# Altium PCB BUCK3524PCB.PcbDoc
Units mm, origin at the board's own origin, x right, y up, seen from the top; angles counter-clockwise.
Board outline 50 x 50 mm, 6 copper layers (Top Layer, Layer 2(GND), Layer 3(PWR), Layer 4(SIG), Layer 5(GND), Bottom Layer), stack 1.538 mm thick; 68 components, 30 nets, 179 pads, 179 vias.
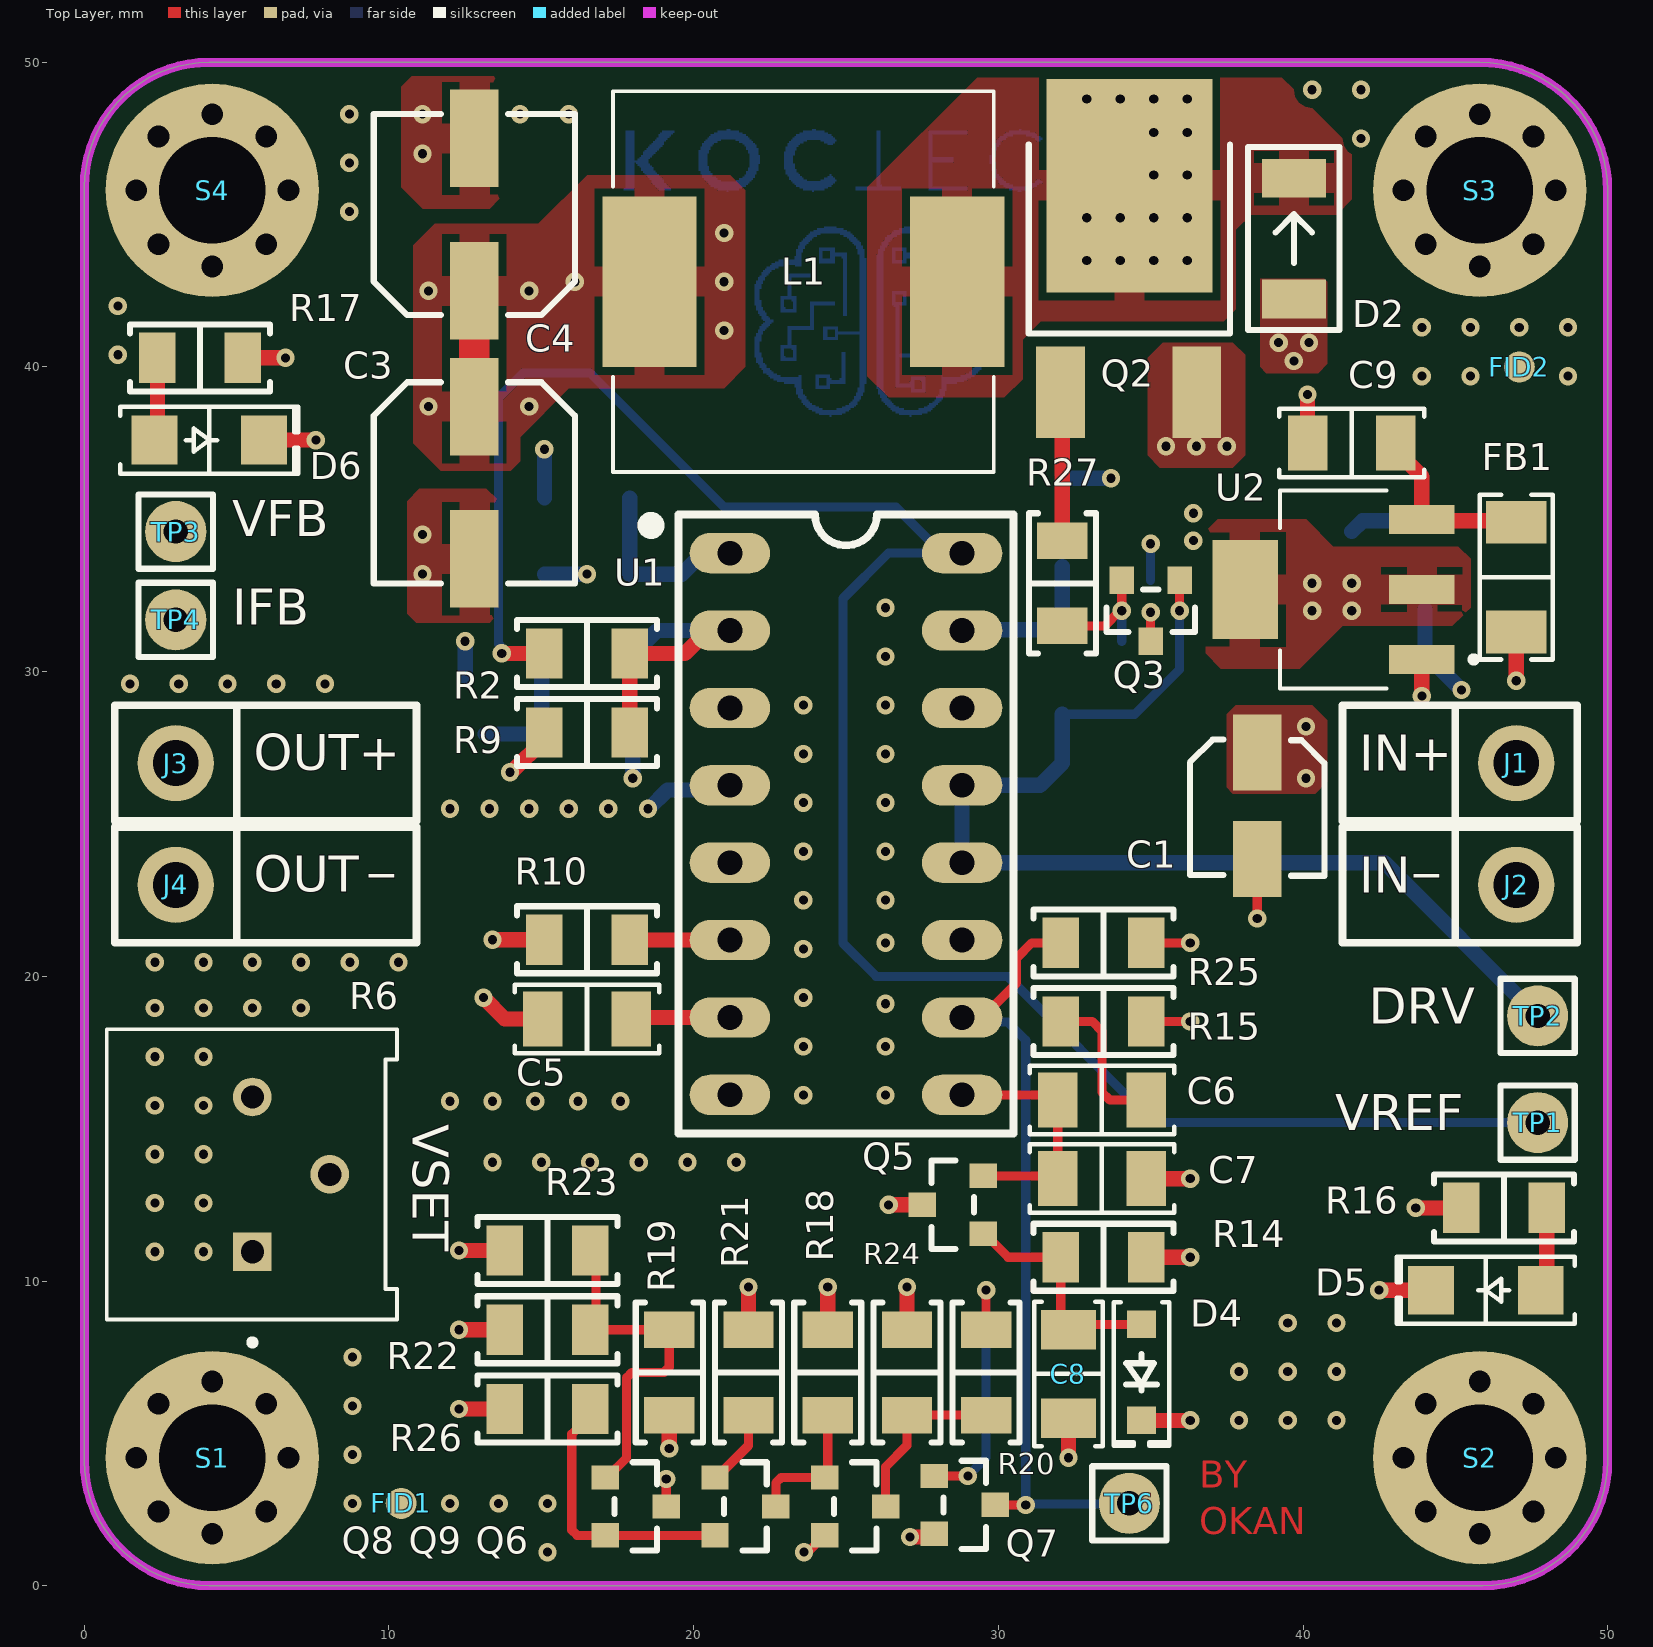
[diagram p0: Top Layer view]
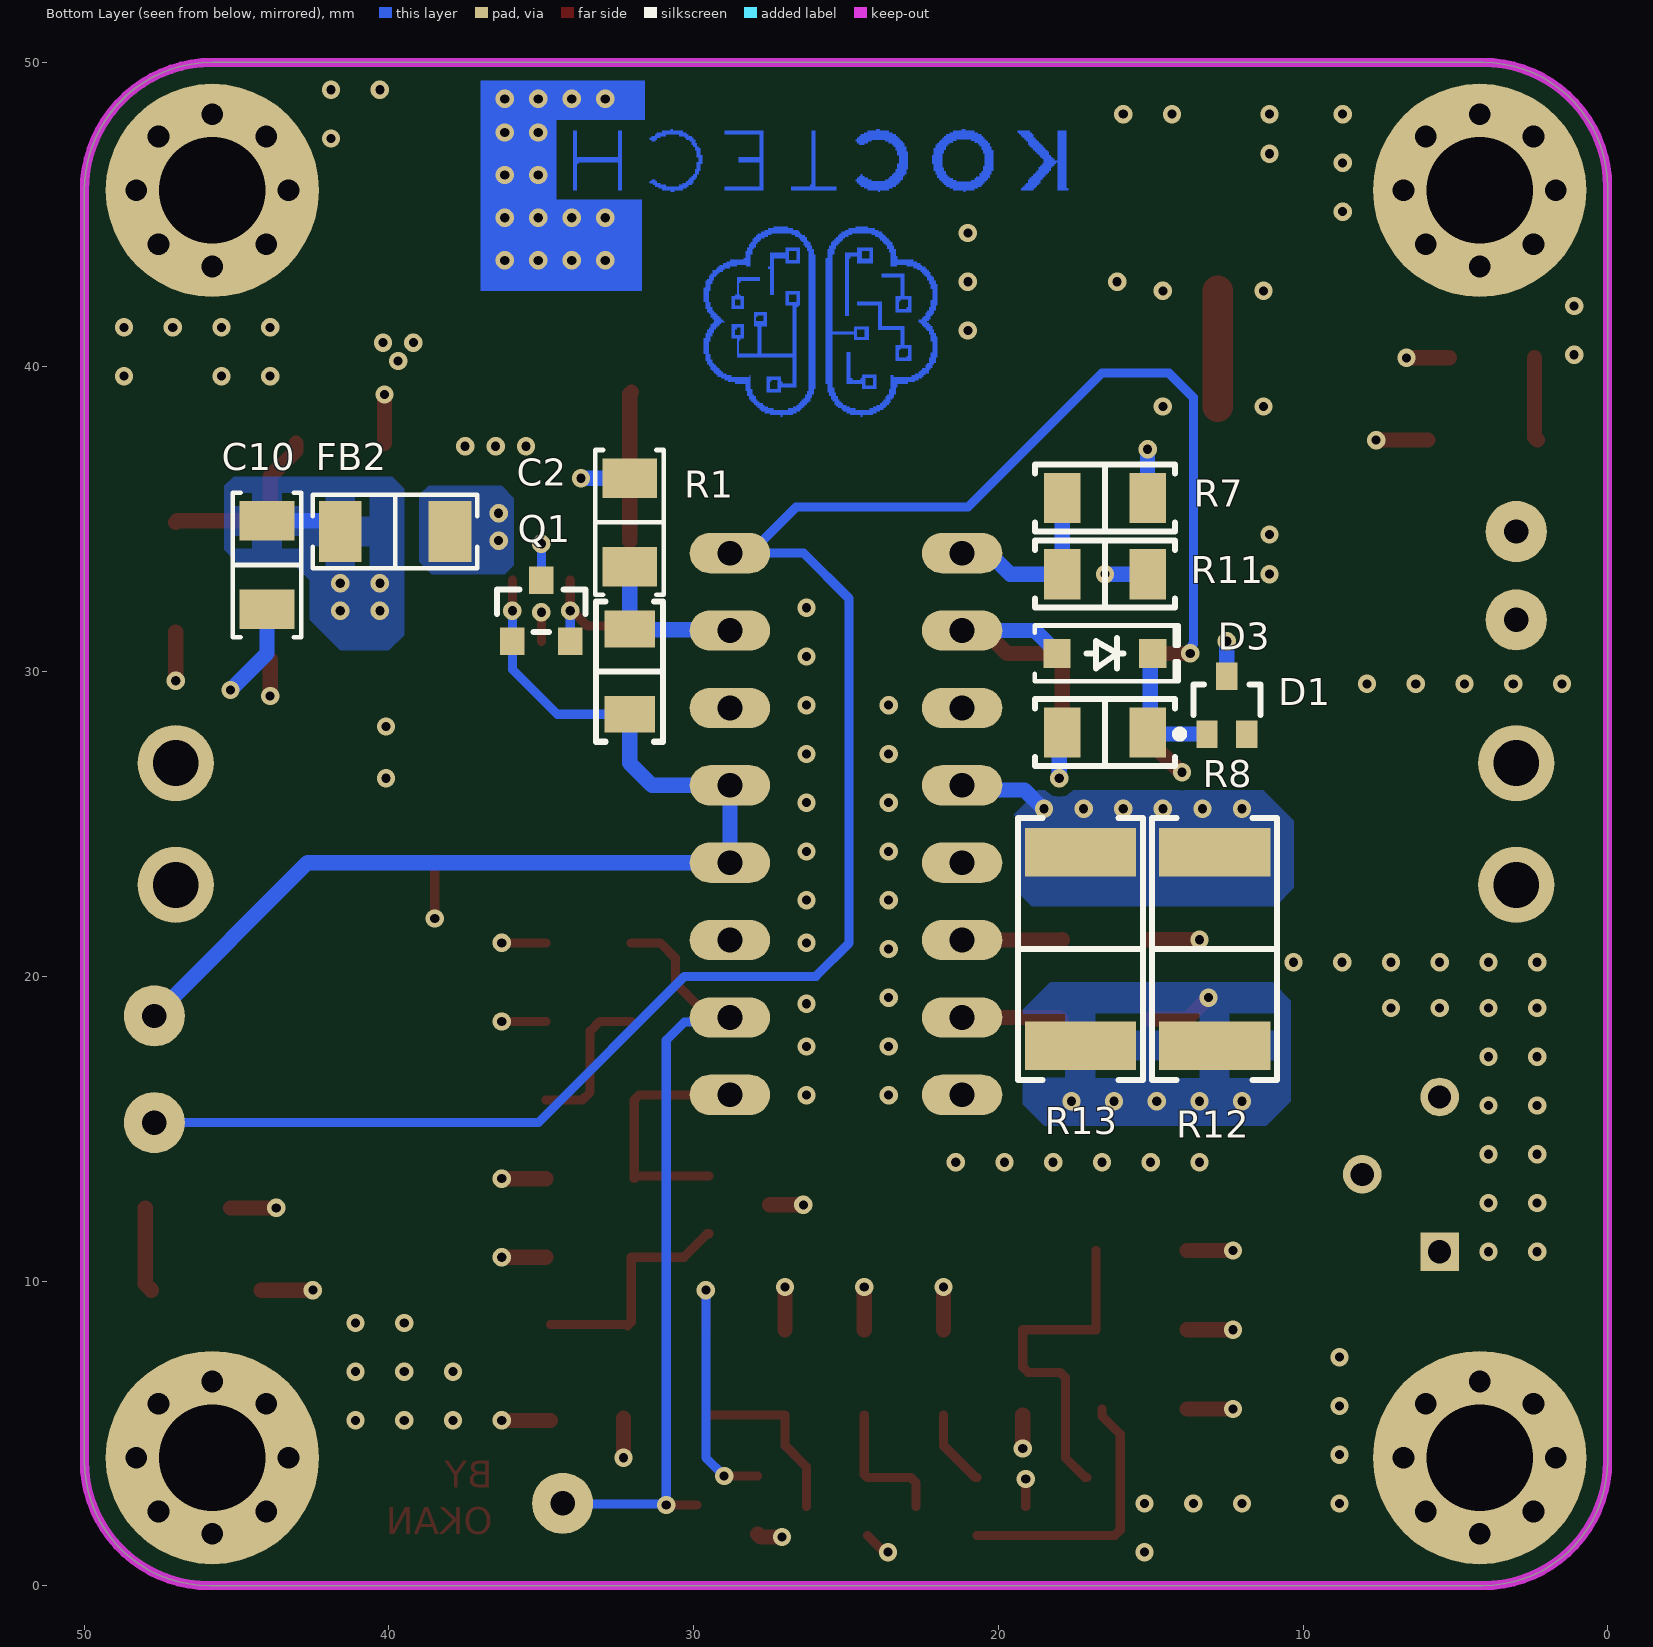
[diagram p1: Bottom Layer view, seen from below]
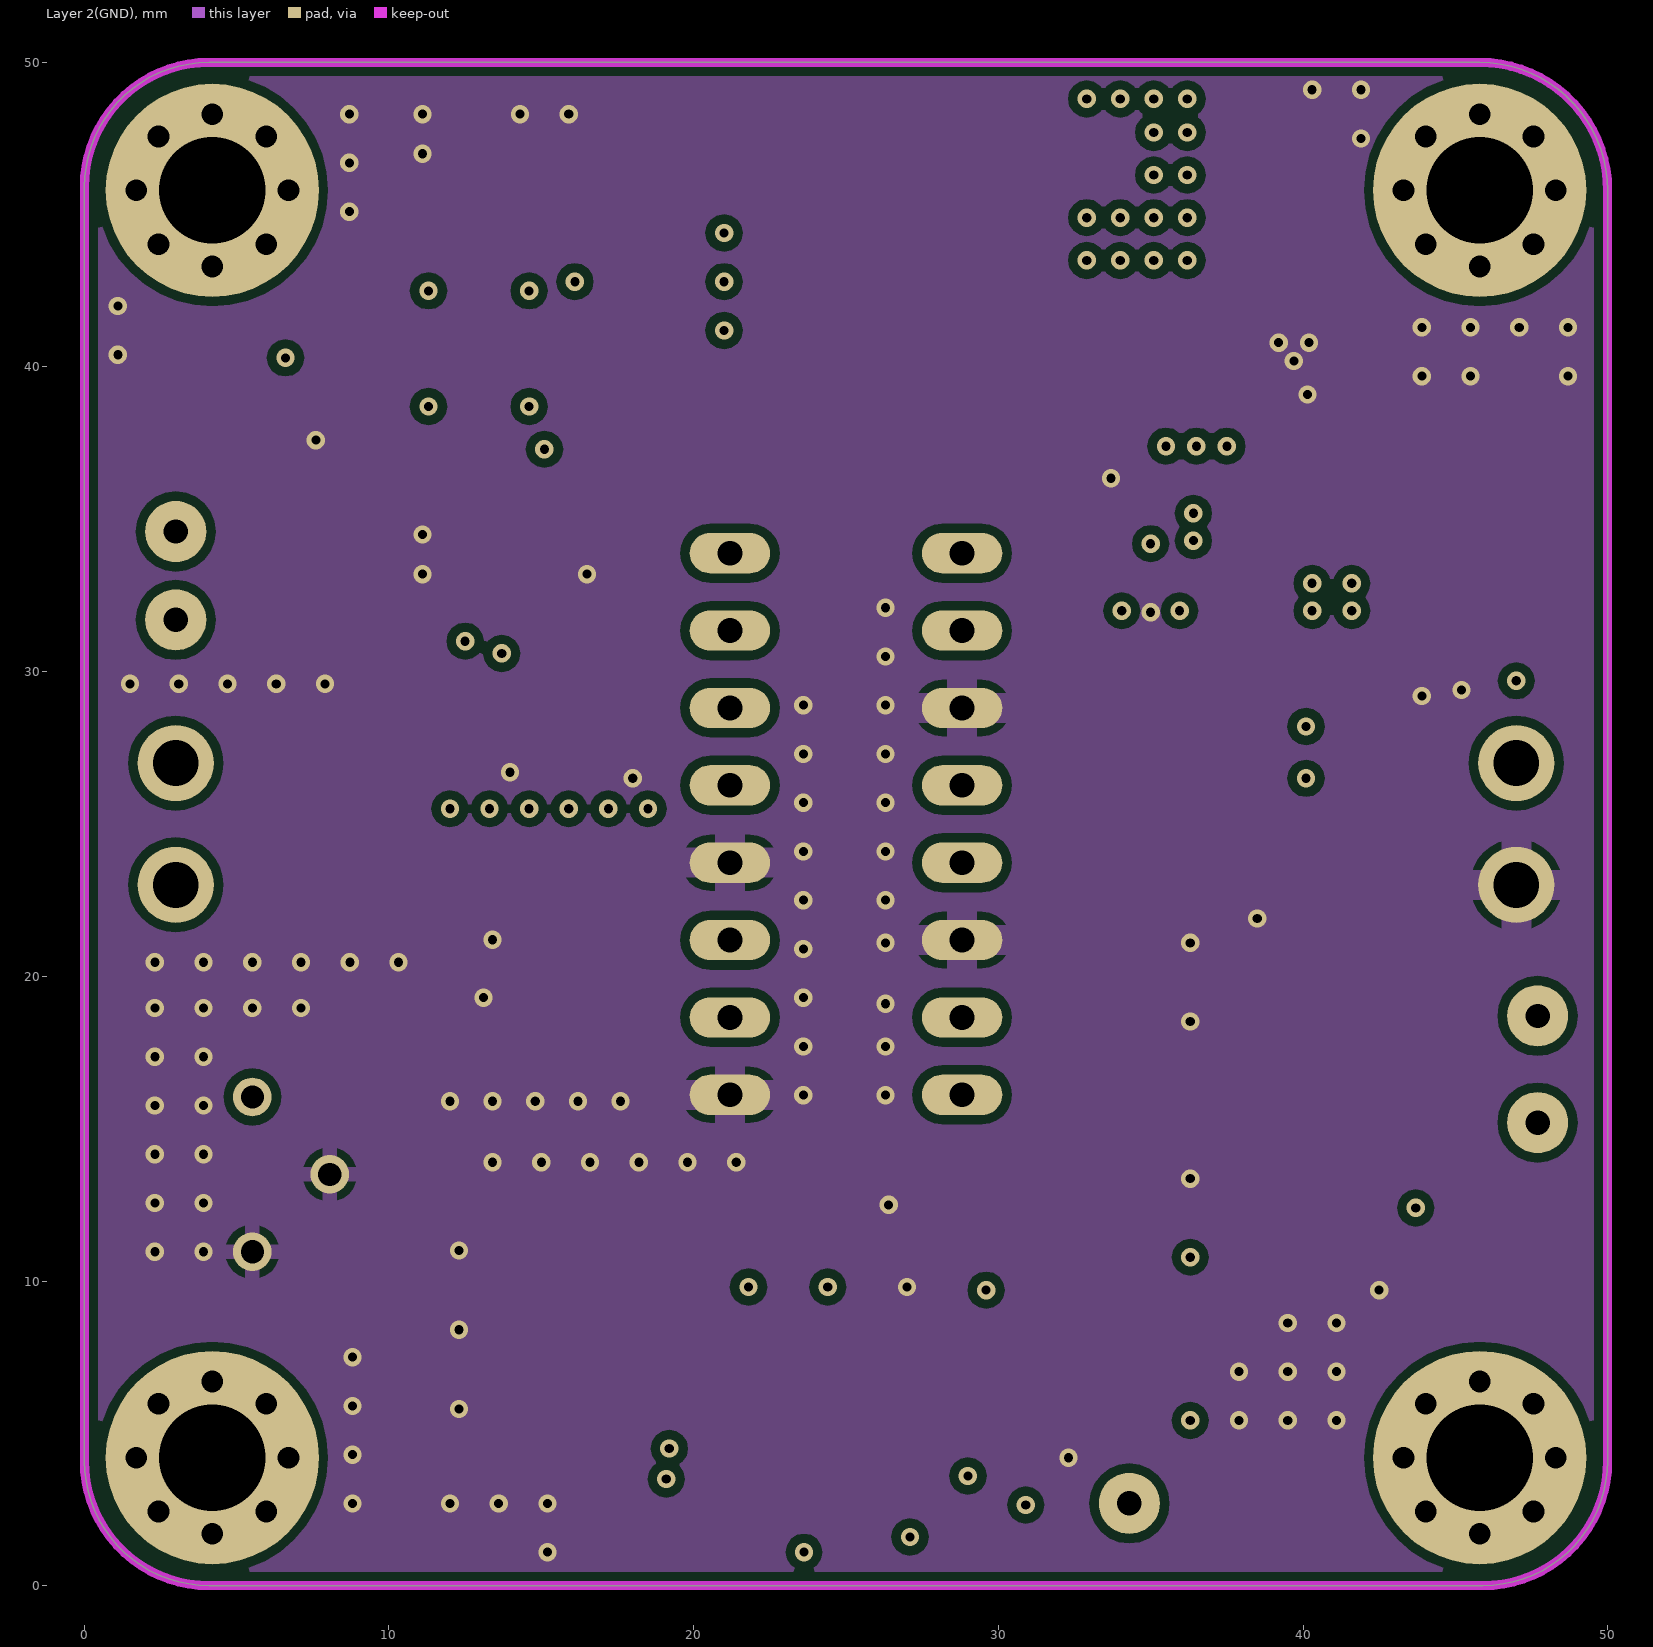
[diagram p2: Layer 2(GND)]
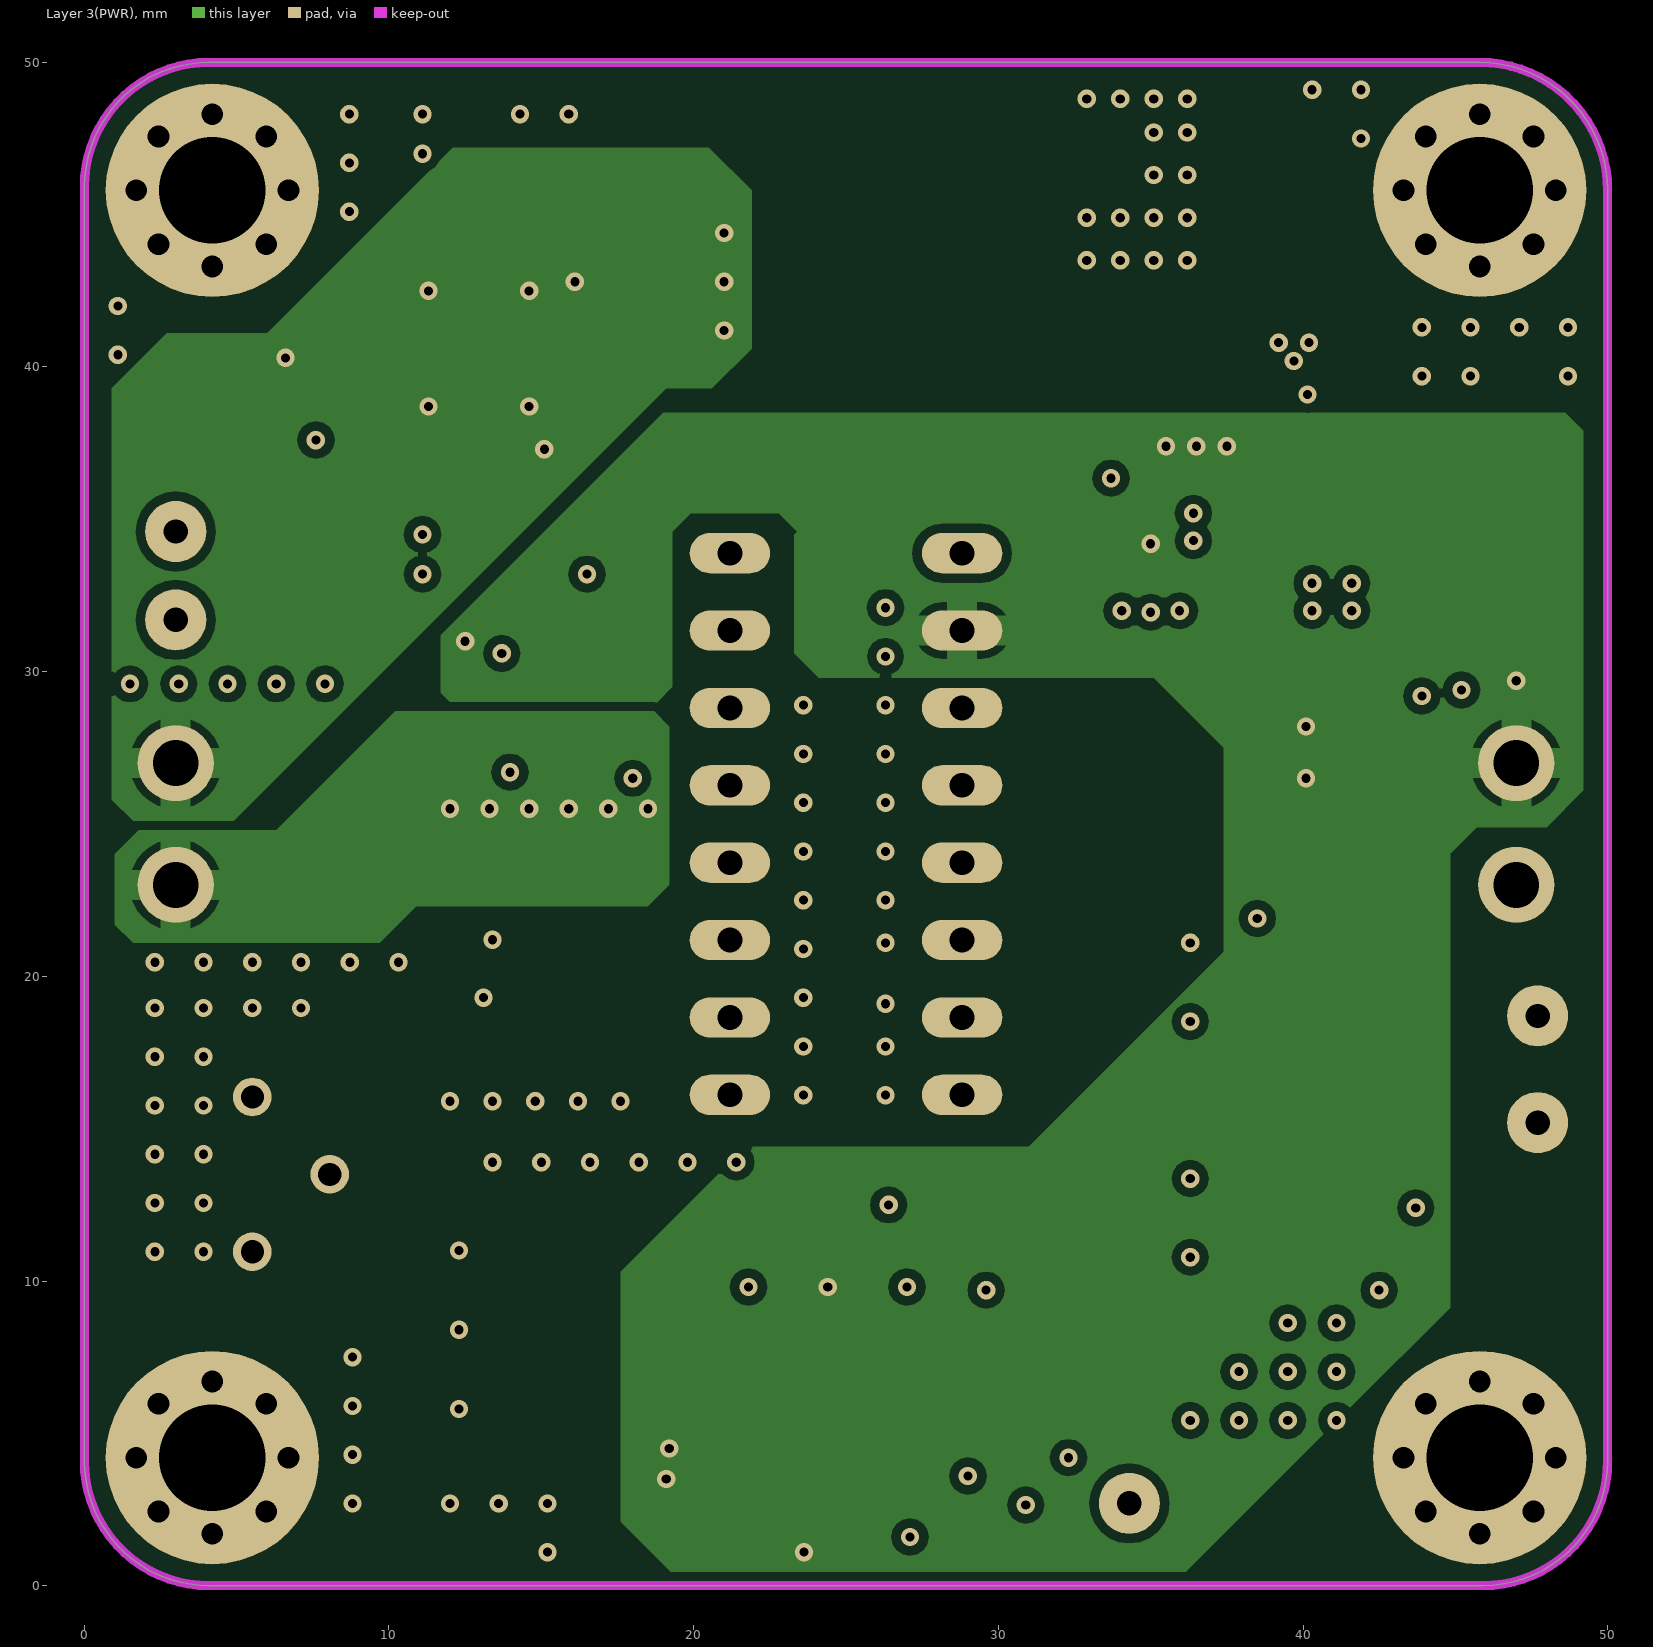
[diagram p3: Layer 3(PWR)]
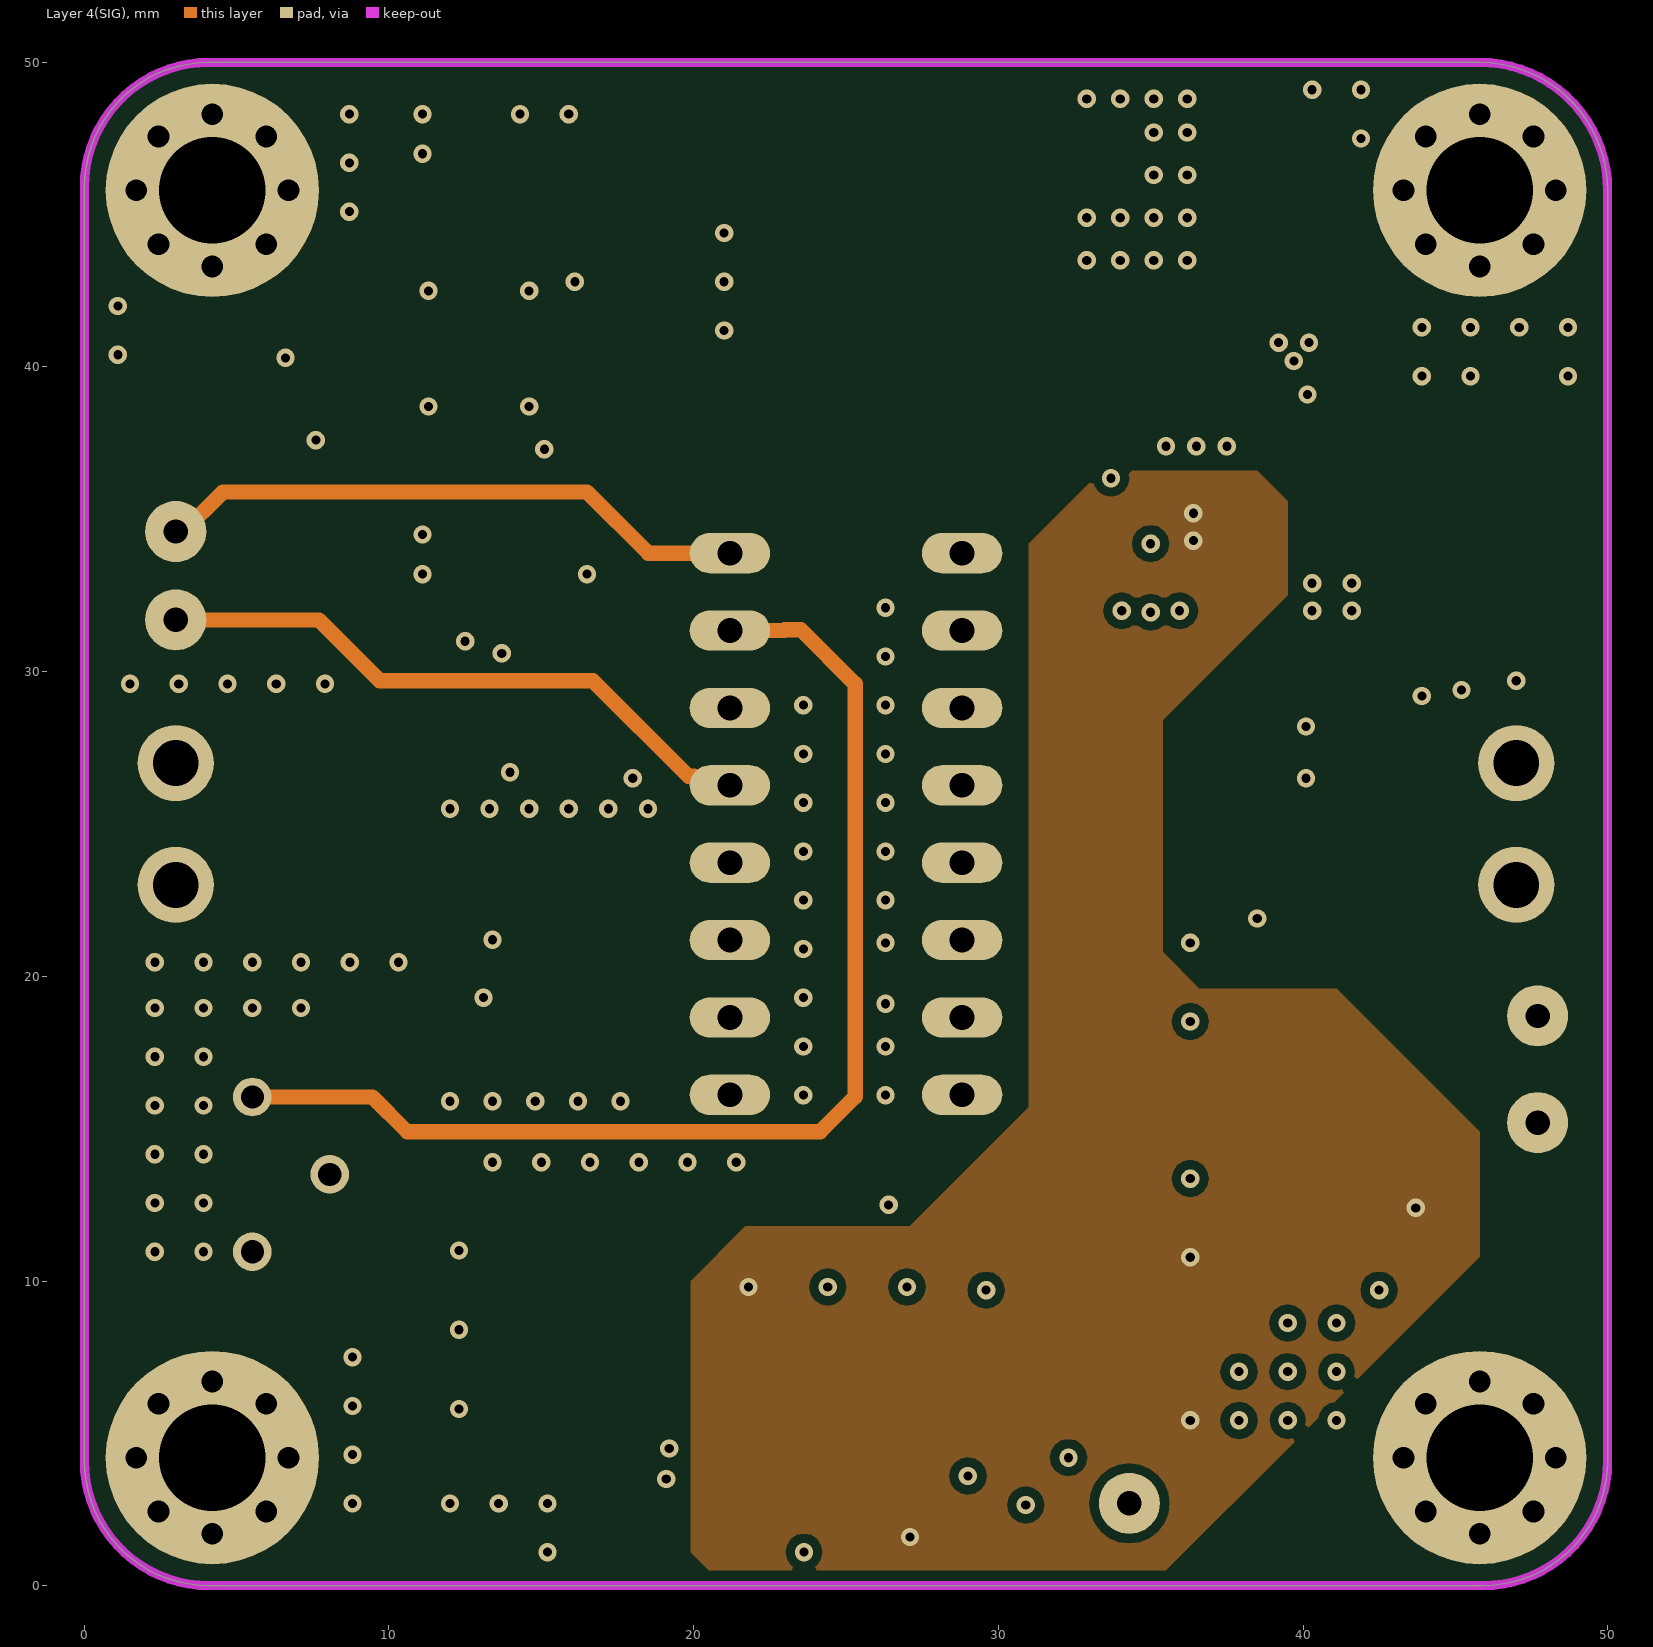
[diagram p4: Layer 4(SIG)]
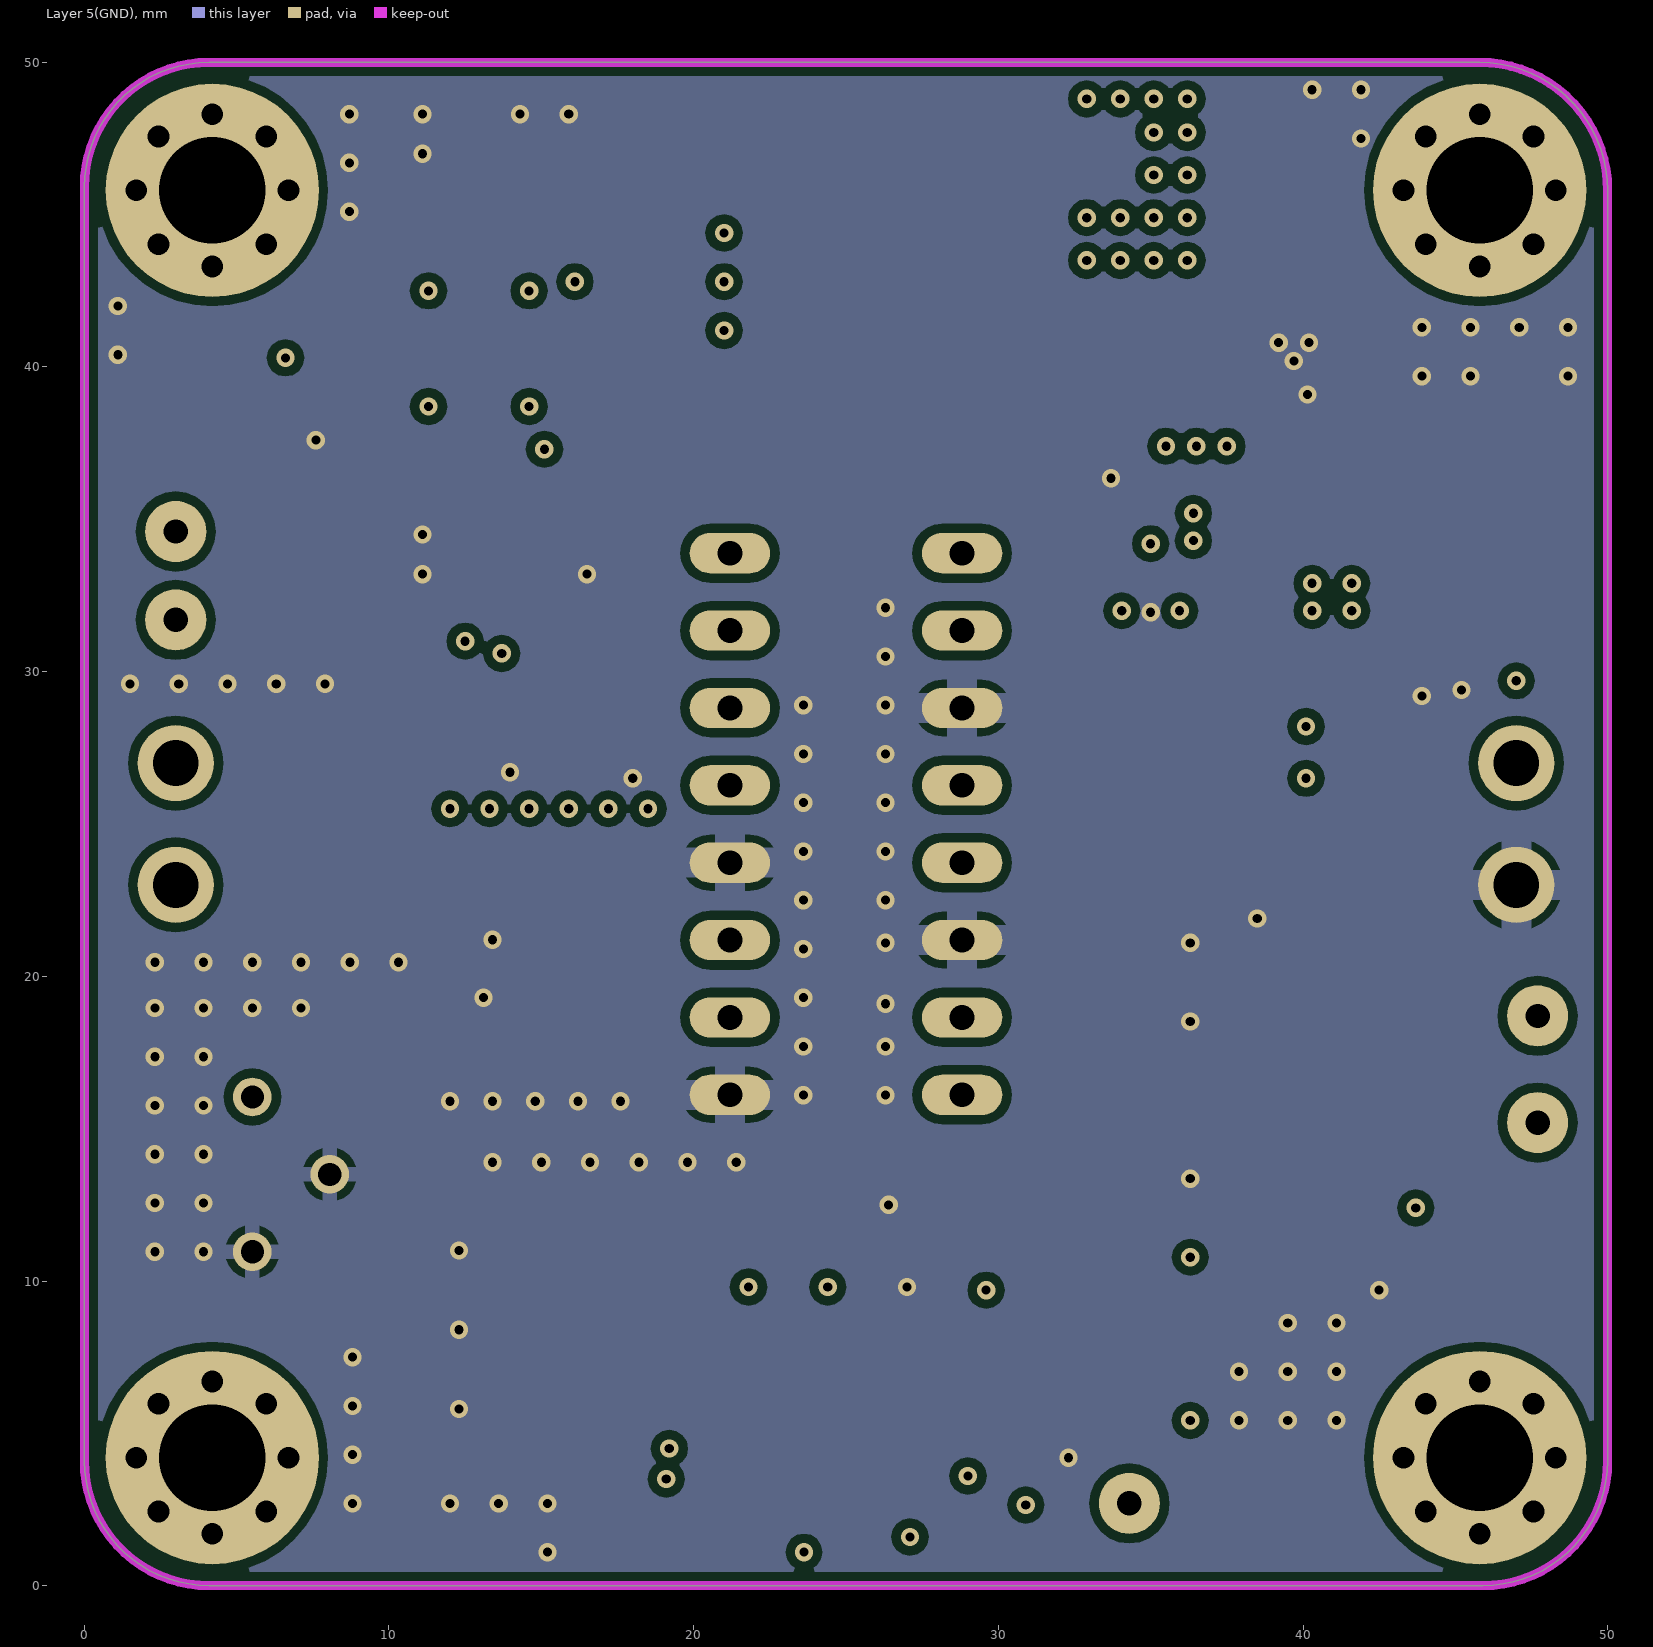
[diagram p5: Layer 5(GND)]
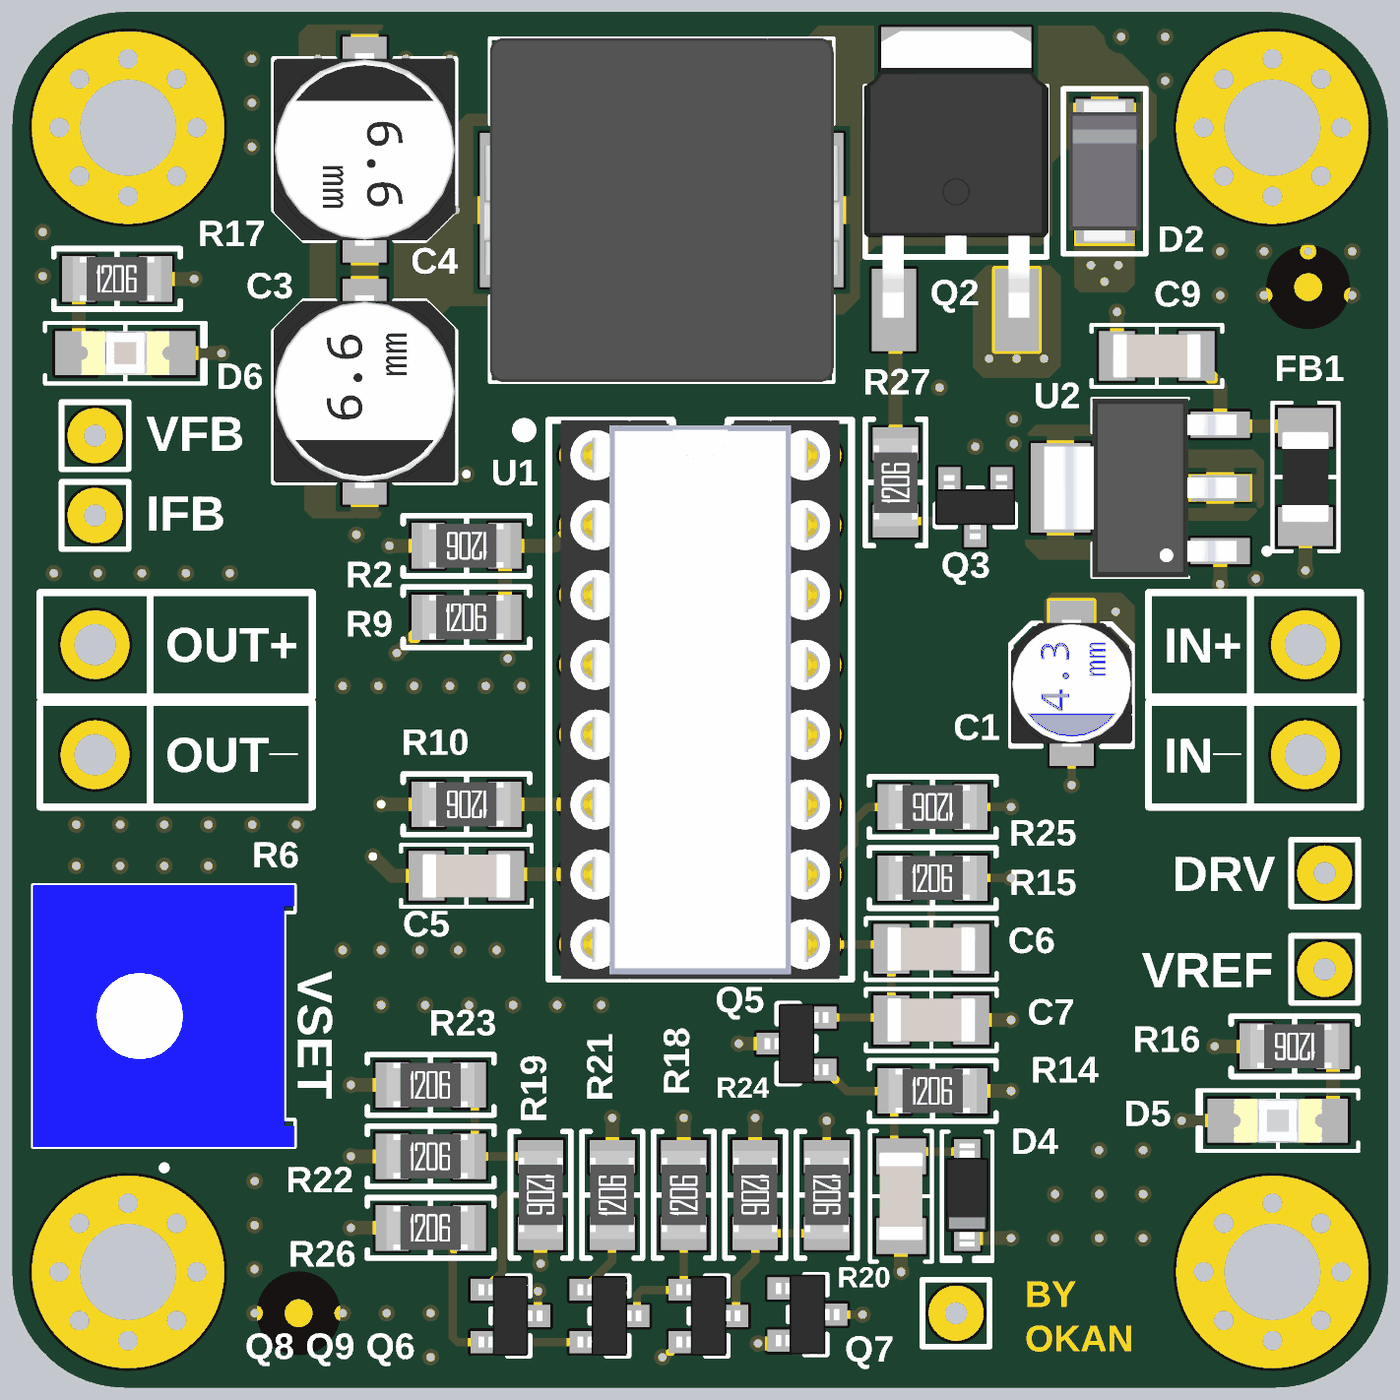
[diagram p6: 3D render of the assembled board from above, using the file's embedded part models]
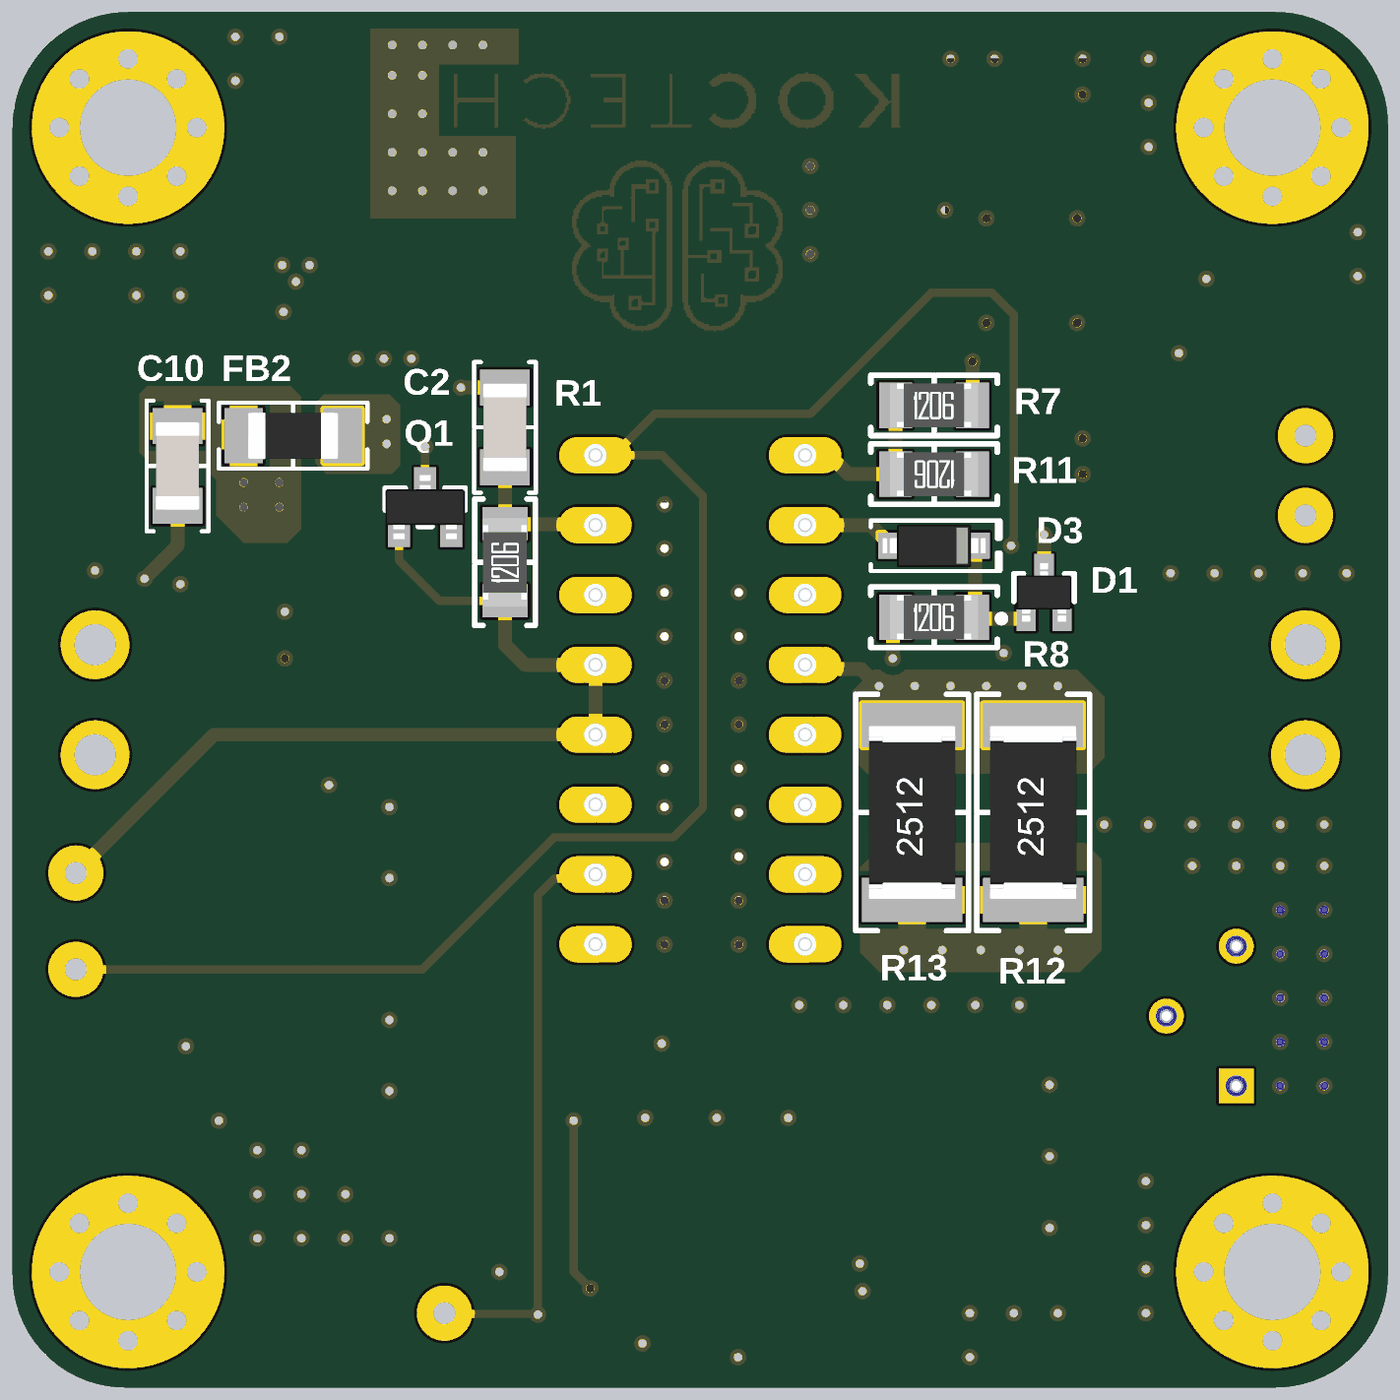
[diagram p7: 3D render of the assembled board from below, using the file's embedded part models]

## Layer stack, top to bottom
Top Solder: solder mask 0.0102, Solder Resist, Dk 3.5
Top Layer: signal copper 0.035
Dielectric 4: prepreg 0.0994, PP-006, Dk 4.1
Layer 2(GND): signal copper 0.0152
Dielectric 2: core 0.55, Core-009, Dk 4.5
Layer 3(PWR): signal copper 0.0152
Dielectric 1: dielectric 0.1088, FR-4, Dk 4.8
Layer 4(SIG): signal copper 0.0152
Dielectric 3: core 0.55, Core-009, Dk 4.5
Layer 5(GND): signal copper 0.0152
Dielectric 5: prepreg 0.0994, PP-006, Dk 4.1
Bottom Layer: signal copper 0.035
Bottom Solder: solder mask 0.0102, Solder Resist, Dk 3.5

## Board outline
4.097,0 cw(c4.097,4.097) 0,4.097 0,45.903 cw(c4.097,45.903) 4.097,50 45.795,50 cw(c45.795,45.795) 50,45.795 50,4.097 cw(c45.903,4.097) 45.903,0

## Design rules (kind name [scope] priority, off if disabled: settings)
Clearance [All] p1: gap=0.3 ignorepadtopadclearanceinfootprint=FALSE
HoleSize [All] p1: absolutevalues=TRUE maxlimit=3.6 minlimit=0.3 maxpercent=80.000 minpercent=20.000
MinimumSolderMaskSliver [All] p1: minsoldermaskwidth=0.022
PolygonConnect PolygonConnect_1 [IsVia] p1: connectstyle=Direct reliefconductorwidth=0.254 reliefentries=4 polygonreliefangle="90 Angle" airgapwidth=0.254
PolygonConnect [All] p2: connectstyle=Relief reliefconductorwidth=0.254 reliefentries=4 polygonreliefangle="90 Angle" airgapwidth=0.254
RoutingVias [All] p1: holewidth=0.3 width=0.6 viastyle="Through Hole" minholewidth=0.3 minwidth=0.6 maxholewidth=0.3 maxwidth=0.6
SilkToSilkClearance [All] p1: silktosilkclearance=0.1
SilkToSolderMaskClearance [IsPad] p1: minsilkscreentomaskgap=0.05 clearancetoexposedcopper=TRUE
SolderMaskExpansion [All] p1: expansion=0.102 istentingtop=FALSE
Width [All] p1: maxlimit=1 minlimit=0.3 preferedwidth=0.3
26 further rules are at their usual default settings.

## Components (designator, comment, footprint, x,y, rotation, side; value= is the part's Value field where it differs from the comment)
C1 "10µF" "CAP ALSMD POLY 4.3MM H5.5MM" 38.5,25.6 r270 top
C2 "10µF" "CAP 1206_3216 - 0.8MM" 32.1,34.9 r270 bottom
C3 "100 µF" "CAP ALSMD 6.6MM H5.4MM" 12.8,36.2 r270 top
C4 "100 µF" "CAP ALSMD 6.6MM H5.4MM" 12.8,45 r90 top
C5 "10 nF" "CAP 1206_3216 - 0.8MM" 16.5,18.6 r0 top
C6 "10 nF" "CAP 1206_3216 - 0.8MM" 33.4,15.94 r180 top
C7 "10 pF" "CAP 1206_3216 - 0.8MM" 33.4,13.36 r180 top
C8 "0.1 µF" "CAP 1206_3216 - 0.8MM" 32.3,6.95 r90 top
C9 "10µF" "CAP 1206_3216 - 0.8MM" 41.6,37.5 r0 top
C10 "10µF" "CAP 1206_3216 - 0.8MM" 44,33.5 r90 bottom
D1 "BZX84W-B10F" "DIODES SOT-323-3" 12.5,28.9 r90 bottom
D2 "SX34-HT" "DO-214AC-2 (SMA)" 39.7,44.215 r90 top
D3 "1N4148W-TP" SOD-123 16.5,30.6 r180 bottom
D4 "1N4148W-TP" SOD-123 34.7,7 r270 top
D5 "Green" "LED 1206_3216 GREEN" 46,9.7 r180 top
D6 "Red" "LED 1206_3216 RED" 4.1,37.6 r0 top
FB1 "600R" "FER 1206_3216" 47,33.1 r90 top
FB2 "600R" "FER 1206_3216" 39.8,34.6 r180 bottom
FID1 "Fidicual" Fidicual 10.4,2.7 r0 top
FID2 "Fidicual" Fidicual 47.1,40 r90 top
J1 "SOLDER_PIN_THT" SOLDER_PIN_THT_1_5#1 48.3,29.4 r180 top
J2 "SOLDER_PIN_THT" SOLDER_PIN_THT_1_5#2 48.3,23.4 r180 top
J3 "SOLDER_PIN_THT" SOLDER_PIN_THT_1_5#3 3,27 r0 top
J4 "SOLDER_PIN_THT" SOLDER_PIN_THT_1_5#4 3,23.4 r0 top
L1 "SRI1204" IND_B82477R4224M100 23.6,42.8 r180 top value=220uH
Q1 "MMBT3904LT1G" "ON SEMI SOT-23-3" 35,32 r90 bottom
Q2 "IRFR9120NTRPBF" DPAK 34.3,44.1 r0 top
Q3 "MMBT3906" "ON SEMI SOT-23-3 - duplicate" 35,32 r270 top
Q5 "MMBT3906" "ON SEMI SOT-23-3 - duplicate" 28.5,12.5 r180 top
Q6 "MMBT3906" "ON SEMI SOT-23-3 - duplicate" 25.3,2.6 r0 top
Q7 "MMBT3906" "ON SEMI SOT-23-3 - duplicate" 28.9,2.65 r0 top
Q8 "MMBT3904LT1G" "ON SEMI SOT-23-3" 18.1,2.6 r0 top
Q9 "MMBT3904LT1G" "ON SEMI SOT-23-3" 21.7,2.6 r0 top
R1 "10 kOhms" "RES 1206_3216" 32.1,30 r90 bottom
R2 "10 kOhms" "RES 1206_3216" 16.5,30.6 r180 top
R6 "10k" TRIM_3386P-1-101T 5.5,13.5 r90 top
R7 "10 kOhms" "RES 1206_3216" 16.5,35.7 r180 bottom
R8 "1 kOhms" "RES 1206_3216" 16.5,28 r180 bottom
R9 "10 kOhms" "RES 1206_3216" 16.5,28 r0 top
R10 "1 kOhms" "RES 1206_3216" 16.5,21.2 r180 top
R11 "10 kOhms" "RES 1206_3216" 16.5,33.2 r0 bottom
R12 "300 mOhms" "RES 2512_6432" 12.9,20.9 r90 bottom
R13 "300 mOhms" "RES 2512_6432" 17.3,20.9 r90 bottom
R14 "10 kOhms" "RES 1206_3216" 33.45,10.78 r0 top
R15 "10 kOhms" "RES 1206_3216" 33.45,18.52 r0 top
R16 "1 kOhms" "RES 1206_3216" 46.6,12.4 r180 top
R17 "1 kOhms" "RES 1206_3216" 3.8,40.3 r0 top
R18 "10 kOhms" "RES 1206_3216" 24.4,7 r90 top
R19 "10 kOhms" "RES 1206_3216" 19.2,7 r270 top
R20 "1 kOhms" "RES 1206_3216" 29.6,7 r270 top
R21 "1 kOhms" "RES 1206_3216" 21.8,7 r90 top
R22 "10 kOhms" "RES 1206_3216" 15.2,8.4 r0 top
R23 "10 kOhms" "RES 1206_3216" 15.2,11 r0 top
R24 "10 kOhms" "RES 1206_3216" 27,7 r270 top
R25 "10 kOhms" "RES 1206_3216" 33.45,21.1 r180 top
R26 "10 kOhms" "RES 1206_3216" 15.2,5.8 r0 top
R27 "10R" "RES 1206_3216" 32.1,32.9 r90 top
S1 "Screw" MY_PAD_3MM 4.2,4.2 r0 top net-tie
S2 "Screw" MY_PAD_3MM 45.8,4.2 r0 top net-tie
S3 "Screw" MY_PAD_3MM 45.8,45.8 r0 top net-tie
S4 "Screw" MY_PAD_3MM 4.2,45.8 r0 top net-tie
TP1 "net?" MY_TestPin 47.7,15.2 r0 top
TP2 "net?" MY_TestPin 47.7,18.7 r0 top
TP3 "net?" MY_TestPin 3,34.6 r0 top
TP4 "net?" MY_TestPin 3,31.7 r0 top
TP6 "net?" MY_TestPin 34.3,2.7 r0 top
U1 "LM3524" DIL16 25,25 r0 top
U2 "LM1117MP-5.0" SOT230P700X180-4N 41,32.7 r180 top

## Footprints (in the part's own frame and the unit in brackets; to place one, negate y for a bottom-side part, rotate by r counter-clockwise, add the part's x,y. Pads: shape width x height; smd on the part's side, far side on the other; paste and mask are expansions set on the pad)
"CAP 1206_3216 - 0.8MM" [mm] "Chip Capacitor, 2-Leads, Body 3.25x1.60mm, IPC Medium Density"
  rect 1.3x1.8 smd: 1(-1.45,0) 2(1.45,0)
  silkscreen extent -2.37,-1.12 2.37,1.12, body extent -1.6,-0.8 1.6,0.8, height 0.8
"CAP ALSMD 6.6MM H5.4MM" [mm] "Aluminum Electrolytic Capacitor, Body 6.60x6.60x5.40mm, IPC Low Density"
  rect 3.2x1.6 smd: 1(-2.5,0) 2(2.5,0)
  silkscreen extent -3.3,-3.3 3.3,3.3, body extent -3.5,-3.3 3.5,3.3, height 5.4
"CAP ALSMD POLY 4.3MM H5.5MM" [mm] "Aluminum Polymer Capacitor, Body 4.30x4.30x5.50mm, IPC Low Density"
  rect 2.5x1.6 smd: 1(-1.75,0) 2(1.75,0)
  silkscreen extent -2.17,-2.21 2.3,2.2, body extent -2.3,-2.2 2.3,2.2, height 5.5
DIL16 [mil]
  oval 104x52 hole 32: 1(-150,350) 2(-150,250) 3(-150,150) 4(-150,50) 5(-150,-50) 6(-150,-150) 7(-150,-250) 8(-150,-350) 9(150,-350) 10(150,-250) 11(150,-150) 12(150,-50) 13(150,50) 14(150,150) 15(150,250) 16(150,350)
  silkscreen extent -258,-400 217,400, body extent -200,-400 200,400, height 350
"DIODES SOT-323-3" [mm] "SOT323, 3-Leads, Body 2.00x2.10mm, Pitch 0.65mm, IPC Medium Density"
  rect 0.9x0.7 smd: 1(-0.95,0.65) 2(0.95,0) 3(-0.95,-0.65)
  silkscreen extent -1.07,-1.1 0.67,1.68, body extent -1.06,-1 1.06,1, height 1
"DO-214AC-2 (SMA)" [mm]
  rect 1.27x2.1 smd: A(-1.985,0) K(1.985,0)
  silkscreen extent -3,-1.5 3,1.5, body extent -2.6,-1.3 2.6,1.3, height 2.42
DPAK [mil]
  rect 63x118 smd: 1(-89,-194) 3(87,-194)
  rect 214.63x275.59 smd: 2(0,72.94)
  silkscreen extent -130,-118 130,126, body extent -132,-205 132,205, height 94
"FER 1206_3216" [mm] "Chip Ferrite, 2-Leads, Body 3.20x1.60mm, IPC Medium Density"
  rect 1.4x2 smd: 1(-1.8,0) 2(1.8,0)
  silkscreen extent -2.7,-1.2 2.7,1.2, body extent -1.65,-0.85 1.65,0.85, height 1.3
Fidicual [mil] "40mm"
  round 40 smd paste-40 mask+40: 1(0,0)
IND_B82477R4224M100 [mm]
  rect 3.1x5.6 smd: 1(-5.05,0) 2(5.05,0)
  silkscreen extent -6.25,-6.25 6.25,6.25, body extent -6.45,-6.25 6.45,6.25, height 6.3
"LED 1206_3216 GREEN" [mm] "Chip Diode, 2-Leads, Body 3.13x1.55mm, IPC Medium Density"
  rect 1.5x1.6 smd: 1(-1.8,0) 2(1.8,0)
  silkscreen extent -2.92,-1.1 2.92,1.1, body extent -1.6,-0.8 1.6,0.8, height 0.9
"LED 1206_3216 RED" [mm] "Chip Diode, 2-Leads, Body 3.13x1.55mm, IPC Medium Density"
  rect 1.5x1.6 smd: 1(-1.8,0) 2(1.8,0)
  silkscreen extent -2.92,-1.1 2.92,1.1, body extent -1.6,-0.8 1.6,0.8, height 0.9
MY_PAD_3MM [mil]
  round 50 hole 28: 0(-98.43,0) 0(-69.6,-69.6) 0(-69.6,69.6) 0(0,-98.43) 0(0,98.43) 0(69.6,-69.6) 0(69.6,69.6) 0(98.43,0)
  round 275.59 hole 137.8: 0(0,0)
MY_TestPin [mil]
  round 79 hole 31.5: 1(0,0)
  silkscreen extent -48,-48 48,48
"ON SEMI SOT-23-3" [mm] "SOT23, 3-Leads, Body 2.90x2.40mm, Pitch 0.95mm, IPC Medium Density"
  rect 0.9x0.8 smd: 1(-1,0.95) 2(-1,-0.95) 3(1,0)
  silkscreen extent -0.7,-1.45 0.7,1.45, body extent -1.16,-1.45 1.16,1.45, height 1
"ON SEMI SOT-23-3 - duplicate" [mm] "SOT23, 3-Leads, Body 2.90x2.40mm, Pitch 0.95mm, IPC Medium Density"
  rect 0.9x0.8 smd: 1(-1,0.95) 2(-1,-0.95) 3(1,0)
  silkscreen extent -0.7,-1.45 0.7,1.45, body extent -1.16,-1.45 1.16,1.45, height 1
"RES 1206_3216" [mm] "Chip Resistor, 2-Leads, Body 3.13x1.55mm, IPC Medium Density"
  rect 1.2x1.65 smd: 1(-1.4,0) 2(1.4,0)
  silkscreen extent -2.3,-1.1 2.3,1.1, body extent -1.6,-0.8 1.6,0.8, height 0.6
"RES 2512_6432" [mm] "Chip Resistor, 2-Leads, Body 6.30x3.15mm, IPC Medium Density"
  rect 1.6x3.65 smd: 1(-3.175,0) 2(3.175,0)
  silkscreen extent -4.3,-2.05 4.3,2.05, body extent -3.15,-1.58 3.15,1.57, height 0.7
SOD-123 [mm] "SOD, 2-Leads, Body 1.55x3.70mm, IPC Medium Density"
  rect 0.9x0.95 smd: 1(-1.575,0) 2(1.575,0)
  silkscreen extent -2.3,-0.92 2.41,0.92, body extent -1.86,-0.78 1.86,0.77, height 1.35
SOLDER_PIN_THT_1_5#1 [mm]
  round 2.5 hole 1.5: 1(1.3,2.4)
SOLDER_PIN_THT_1_5#2 [mm]
  round 2.5 hole 1.5: 1(1.3,0.4)
SOLDER_PIN_THT_1_5#3 [mm]
  round 2.5 hole 1.5: 1(0,0)
SOLDER_PIN_THT_1_5#4 [mm]
  round 2.5 hole 1.5: 1(0,-0.4)
SOT230P700X180-4N [mm]
  rect 2.15x0.95 smd: 1(-2.9,2.3) 2(-2.9,0) 3(-2.9,-2.3)
  rect 2.15x3.25 smd: 4(2.9,0)
  silkscreen extent -4.7,-3.25 1.75,3.25, body extent -3.5,-3.25 3.5,3.25, height 1.8
TRIM_3386P-1-101T [mm]
  rect 1.268x1.268 / inner round 1.268 / far side rect 1.268x1.268 hole 0.76: 1(-2.54,-0.015)
  round 1.268 hole 0.76: 2(0,-2.555) 3(2.54,-0.015)
  silkscreen extent -5.61,-4.76 4.76,4.76, body extent -4.76,-4.76 4.76,4.76, height 4.83

## Part data
C1: library part UWR1E100MCL1GB, "CAP ALUM 10UF 20% 25V SMD", Device Package="Radial, Can - SMD", Lifetime @ Temp.="2000 Hrs @ 85°C", Manufacturer=Nichicon, Operating Temperature="-40°C ~ 85°C", Ripple Current @ High Frequency="40.5mA @ 10kHz", Ripple Current @ Low Frequency="27mA @ 120Hz", Supplier Part Number 1=493-17501-1-ND, Tolerance=±20%, Voltage - Rated=25V, Applications="General Purpose", Capacitance=10µF, ComponentLink1Description=Datasheet, ComponentLink1URL=https://products.nichicon.co.jp/en/pdf/XJA043/e-uwx.pdf, ComponentLink2Description="DigiKey Link", ComponentLink2URL=http://digikey.com/product-detail/en/nichicon/UWR1E100MCL1GB/493-17501-1-ND/8582493, Height - Seated (Max)="0.217\" (5.50mm)", LastUpdated="9/2/2020 1:23:43 AM", Lifecycle Status=Active, Minimum Order=1, Mounting Type="Surface Mount", Package / Case="Radial, Can - SMD", Packaging=TapeAndReel, Part Number=UWR1E100MCL1GB, Part Status=Active, PartId=7448, Polarization=Polar, Price=0.07, Series=UWR, Size / Dimension="0.157\" Dia (4.00mm)", Supplier 1=DigiKey, Surface Mount Land Size="0.169\" L x 0.169\" W (4.30mm x 4.30mm)"
C2 C9 C10: library part CL31A106KACLNNC, "CAP CER 10UF 25V X5R 1206", Device Package="1206 (3216 Metric)", Manufacturer="Samsung Electro-Mechanics", Operating Temperature="-55°C ~ 85°C", Supplier Part Number 1=1276-2720-1-ND, Temperature Coefficient=X5R, Tolerance=±10%, Voltage - Rated=25V, Applications="General Purpose", Capacitance=10µF, ComponentLink1Description=Datasheet, ComponentLink1URL=http://www.samsungsem.com/kr/support/product-search/mlcc/CL31A106KACLNNC.jsp, ComponentLink2Description="DigiKey Link", ComponentLink2URL=https://www.digikey.com/en/products/detail/samsung-electro-mechanics/CL31A106KACLNNC/3888378, Features="Low Profile", LastUpdated="19.09.2022 13:06:35", Lifecycle Status=Active, Minimum Order=1, Mounting Type="Surface Mount, MLCC", Package / Case="1206 (3216 Metric)", Packaging=TapeAndReel, Part Number=CL31A106KACLNNC, Part Status=Active, PartId=20311, Price=0.04, Series=CL, Size / Dimension="0.126\" L x 0.063\" W (3.20mm x 1.60mm)", Supplier 1=DigiKey, Thickness (Max)="0.037\" (0.95mm)"
C3 C4: library part UCW1E101MCL1GS, "CAP ALUM 100UF 20% 25V SMD", Device Package="Radial, Can - SMD", Lifetime @ Temp.="7000 Hrs @ 105°C", Manufacturer=Nichicon, Operating Temperature="-25°C ~ 105°C", Ripple Current @ High Frequency="230 mA @ 100 kHz", Ripple Current @ Low Frequency="115 mA @ 120 Hz", Supplier Part Number 1=493-9418-1-ND, Tolerance=±20%, Voltage - Rated="25 V", Applications="General Purpose", Capacitance="100 µF", ComponentLink1Description=Datasheet, ComponentLink1URL=http://nichicon-us.com/english/products/pdfs/e-ucw.pdf, ComponentLink2Description="DigiKey Link", ComponentLink2URL=https://www.digikey.com/en/products/detail/nichicon/UCW1E101MCL1GS/2549775, Height - Seated (Max)="0.343\" (8.70mm)", LastUpdated="19.09.2022 13:45:21", Lifecycle Status=Active, Minimum Order=1, Mounting Type="Surface Mount", Package / Case="Radial, Can - SMD", Packaging=TapeAndReel, Part Number=UCW1E101MCL1GS, Part Status=Active, PartId=26995, Polarization=Polar, Price=0.20, Series=UCW, Size / Dimension="0.248\" Dia (6.30mm)", Supplier 1=DigiKey, Surface Mount Land Size="0.260\" L x 0.260\" W (6.60mm x 6.60mm)", Impedance="1 Ohms"
C5 C6: library part C1206C103F3GECAUTO, "CAP CER 1206 10NF 25V C0G 1%", Capacitance="10000 pF", Device Package="1206 (3216 Metric)", Manufacturer=KEMET, Operating Temperature="-55°C ~ 125°C", Ratings=AEC-Q200, Supplier Part Number 1=399-C1206C103F3GECAUTOCT-ND, Temperature Coefficient="C0G, NP0", Tolerance=±1%, Voltage - Rated=25V, Applications="Automotive, ESD Protection", ComponentLink1Description=Datasheet, ComponentLink1URL=https://api.kemet.com/component-edge/download/datasheet/C1206C103F3GECAUTO.pdf, ComponentLink2Description="DigiKey Link", ComponentLink2URL=https://www.digikey.com/en/products/detail/kemet/C1206C103F3GECAUTO/8647500, Features="Low ESL", LastUpdated="19.09.2022 13:06:10", Lifecycle Status=Active, Minimum Order=1, Mounting Type="Surface Mount, MLCC", Package / Case="1206 (3216 Metric)", Packaging=TapeAndReel, Part Number=C1206C103F3GECAUTO, Part Status=Active, PartId=30341, Price=0.67, Series="ESD SMD Auto C0G", Size / Dimension="0.126\" L x 0.063\" W (3.20mm x 1.60mm)", Supplier 1=DigiKey, Thickness (Max)="0.039\" (1.00mm)"
C7: library part CC1206JRNPO9BN100, "CAP CER 10PF 50V C0G/NPO 1206", Device Package="1206 (3216 Metric)", Manufacturer=Yageo, Operating Temperature="-55°C ~ 125°C", Supplier Part Number 1=311-1150-1-ND, Temperature Coefficient="C0G, NP0", Tolerance=±5%, Voltage - Rated=50V, Applications="General Purpose", Capacitance="10 pF", ComponentLink1Description=Datasheet, ComponentLink1URL=https://www.yageo.com/upload/media/product/productsearch/datasheet/mlcc/UPY-GP_NP0_16V-to-50V_17.pdf, ComponentLink2Description="DigiKey Link", ComponentLink2URL=https://www.digikey.com/en/products/detail/yageo/CC1206JRNPO9BN100/302884, LastUpdated="19.09.2022 13:06:45", Lifecycle Status=Active, Minimum Order=1, Mounting Type="Surface Mount, MLCC", Package / Case="1206 (3216 Metric)", Packaging=TapeAndReel, Part Number=CC1206JRNPO9BN100, Part Status=Active, PartId=18732, Price=0.04, Series=CC, Size / Dimension="0.126\" L x 0.063\" W (3.20mm x 1.60mm)", Supplier 1=DigiKey, Thickness (Max)="0.024\" (0.60mm)"
C8: library part C1206C104K8RAC7800, "CAP CER 0.1UF 10V X7R 1206", Device Package="1206 (3216 Metric)", Manufacturer=KEMET, Operating Temperature="-55°C ~ 125°C", Supplier Part Number 1=399-15539-1-ND, Temperature Coefficient=X7R, Tolerance=±10%, Voltage - Rated=10V, Applications="Bypass, Decoupling", Capacitance="0.1 µF", ComponentLink1Description=Datasheet, ComponentLink1URL=https://api.kemet.com/component-edge/download/datasheet/C1206C104K8RACTU.pdf, ComponentLink2Description="DigiKey Link", ComponentLink2URL=https://www.digikey.com/en/products/detail/kemet/C1206C104K8RAC7800/2215080, LastUpdated="19.09.2022 13:06:45", Lifecycle Status=Active, Minimum Order=1, Mounting Type="Surface Mount, MLCC", Package / Case="1206 (3216 Metric)", Packaging=TapeAndReel, Part Number=C1206C104K8RAC7800, Part Status=Active, PartId=19429, Price=0.08, Series="SMD Comm X7R", Size / Dimension="0.126\" L x 0.063\" W (3.20mm x 1.60mm)", Supplier 1=DigiKey, Thickness (Max)="0.035\" (0.88mm)"
D1: "DIODE ZENER 10V 275MW SOT323", Current - Reverse Leakage @ Vr="200 nA @ 7 V", Manufacturer="Nexperia USA Inc.", Operating Temperature="150°C (TJ)", Package / Case="SC-70, SOT-323", Power - Max="275 mW", Supplier Device Package=SOT-323, Supplier Part Number 1=1727-8249-1-ND, Tolerance=±2%, Voltage - Forward (Vf) (Max) @ If="900 mV @ 10 mA", Voltage - Zener (Nom) (Vz)="10 V", ComponentLink1Description=Datasheet, ComponentLink1URL=https://assets.nexperia.com/documents/data-sheet/BZX84W_SER.pdf, ComponentLink2Description="DigiKey Link", ComponentLink2URL=https://www.digikey.com/en/products/detail/nexperia-usa-inc/BZX84W-B10F/9380664, LastUpdated="19.09.2022 13:51:24", Lifecycle Status=Active, Minimum Order=1, Mounting Type="Surface Mount", Packaging=TapeAndReel, Part Number=BZX84W-B10F, Part Status=Active, PartId=793, Price=0.02, Series="Automotive, AEC-Q101", Supplier 1=DigiKey, Impedance (Max) (Zzt)="20 Ohms"
D2: library part D_SCHOTTKY_SMA, "Diode Schottky SMD SMA (DO-214AA)", Manufacturer=Hottech, Manufacturer Part Number=17155
D3 D4: "DIODE GEN PURP 100V 150MA SOD123", Current - Average Rectified (Io)=150mA, Current - Reverse Leakage @ Vr="1µA @ 75V", Manufacturer="Micro Commercial Co", Operating Temperature - Junction="-65°C ~ 150°C", Package / Case=SOD-123, Supplier Part Number 1=1N4148WTPMSCT-ND, Voltage - DC Reverse (Vr) (Max)=100V, Voltage - Forward (Vf) (Max) @ If="1.25V @ 150mA", ComponentLink1Description=Datasheet, ComponentLink1URL=https://www.mccsemi.com/pdf/Products/1N4148W(SOD123).pdf, ComponentLink2Description="DigiKey Link", ComponentLink2URL=http://digikey.com/product-detail/en/micro-commercial-co/1N4148W-TP/1N4148WTPMSCT-ND/717311, Diode Type=Standard, LastUpdated="9/2/2020 1:19:08 AM", Lifecycle Status=Active, Minimum Order=1, Mounting Type="Surface Mount", Packaging=TapeAndReel, Part Number=1N4148W-TP, Part Status=Active, PartId=999, Price=0.03, Reverse Recovery Time (trr)=4ns, Series=-, Speed="Small Signal =< 200mA (Io), Any Speed", Supplier 1=DigiKey, Supplier Device Package=SOD-123
D5: library part SML-LX1206GW-TR, "LED GREEN DIFFUSED 1206 SMD", Current - Test=20mA, Device Package="1206 (3216 Metric)", Lens Color=White, Manufacturer="Lumex Opto/Components Inc.", Millicandela Rating=10mcd, Supplier Device Package=1206, Supplier Part Number 1=67-1002-1-ND, Voltage - Forward (Vf) (Typ)=2.2V, Color=Green, ComponentLink1Description=Datasheet, ComponentLink1URL=https://www.lumex.com/content/files/ProductAttachment/SML-LX1206GW-TR.pdf, ComponentLink2Description="DigiKey Link", ComponentLink2URL=https://www.digikey.com/en/products/detail/lumex-opto-components-inc/SML-LX1206GW-TR/270798, Configuration=Standard, Height (Max)=1.10mm, LastUpdated="19.09.2022 13:50:05", Lens Size="2.00mm x 1.60mm", Lens Style="Rectangle with Flat Top", Lens Transparency=Diffused, Lifecycle Status=Active, Minimum Order=1, Mounting Type="Surface Mount", Package / Case="1206 (3216 Metric)", Packaging=TapeAndReel, Part Number=SML-LX1206GW-TR, Part Status=Active, PartId=572, Price=0.09, Series=-, Size / Dimension="3.20mm L x 1.60mm W", Supplier 1=DigiKey, Viewing Angle=160°, Wavelength - Peak=565nm
D6: library part SML-LX1206IW-TR, "LED RED DIFFUSED 1206 SMD", Current - Test=20mA, Device Package="1206 (3216 Metric)", Lens Color=White, Manufacturer="Lumex Opto/Components Inc.", Millicandela Rating=6mcd, Supplier Device Package=1206, Supplier Part Number 1=67-1003-1-ND, Voltage - Forward (Vf) (Typ)=2V, Color=Red, ComponentLink1Description=Datasheet, ComponentLink1URL=https://www.lumex.com/content/files/ProductAttachment/SML-LX1206IW-TR.pdf, ComponentLink2Description="DigiKey Link", ComponentLink2URL=https://www.digikey.com/en/products/detail/lumex-opto-components-inc/SML-LX1206IW-TR/270800, Configuration=Standard, Height (Max)=1.10mm, LastUpdated="19.09.2022 13:50:50", Lens Size="2.00mm x 1.60mm", Lens Style="Rectangle with Flat Top", Lens Transparency=Diffused, Lifecycle Status=Active, Minimum Order=1, Mounting Type="Surface Mount", Package / Case="1206 (3216 Metric)", Packaging=TapeAndReel, Part Number=SML-LX1206IW-TR, Part Status=Active, PartId=192, Price=0.07, Series=-, Size / Dimension="3.20mm L x 1.60mm W", Supplier 1=DigiKey, Viewing Angle=160°, Wavelength - Peak=635nm
FB1 FB2: library part BLM31KN601BH1L, "600OHM DCR MAX 2) A RATED CURREN", Current Rating (Max)=2A, DC Resistance (DCR) (Max)=38mOhm, Device Package="1206 (3216 Metric)", Manufacturer="Murata Electronics", Operating Temperature="-55°C ~ 150°C", Ratings=AEC-Q200, Supplier Part Number 1=490-18087-1-ND, ComponentLink1Description=Datasheet, ComponentLink1URL=https://www.murata.com/en-global/products/productdata/8800169623582/QNFA9138.pdf, ComponentLink2Description="DigiKey Link", ComponentLink2URL=http://digikey.com/product-detail/en/murata-electronics/BLM31KN601BH1L/490-18087-1-ND/9559599, Filter Type="Power Line", Height (Max)="0.071\" (1.80mm)", LastUpdated="2.09.2020 01:18:24", Lifecycle Status=Active, Minimum Order=1, Mounting Type="Surface Mount", Number of Lines=1, Package / Case="1206 (3216 Metric)", Packaging=TapeAndReel, Part Number=BLM31KN601BH1L, Part Status=Active, PartId=1583, Price=0.10, Series="EMIFIL®, BLM31", Size / Dimension="0.126\" L x 0.063\" W (3.20mm x 1.60mm)", Supplier 1=DigiKey
J1 J2 J3 J4: "Solder Pin 1.5mm Through-Hole"
L1: "220uH 12X12 1.3A", Package=None, Availability="In Stock", Check_prices=https://www.snapeda.com/parts/B82477R4224M100/TDK/view-part/?ref=eda, MF=TDK, MP=B82477R4224M100, Price=None, Purchase-URL=https://pricing.snapeda.com/search/part/B82477R4224M100/?ref=eda, SnapEDA_Link=https://www.snapeda.com/parts/B82477R4224M100/TDK/view-part/?ref=snap
Q1 Q8 Q9: "TRANS NPN 40V 0.2A SOT23", Current - Collector (Ic) (Max)=200mA, DC Current Gain (hFE) (Min) @ Ic, Vce="100 @ 10mA, 1V", Frequency - Transition=300MHz, Manufacturer="ON Semiconductor", Operating Temperature="-55°C ~ 150°C (TJ)", Package / Case="TO-236-3, SC-59, SOT-23-3", Power - Max=300mW, Supplier Device Package="SOT-23-3 (TO-236)", Supplier Part Number 1=MMBT3904LT1GOSCT-ND, Voltage - Collector Emitter Breakdown (Max)=40V, ComponentLink1Description=Datasheet, ComponentLink1URL=http://www.onsemi.com/pub/Collateral/MMBT3904LT1-D.PDF, ComponentLink2Description="DigiKey Link", ComponentLink2URL=http://digikey.com/product-detail/en/on-semiconductor/MMBT3904LT1G/MMBT3904LT1GOSCT-ND/1139813, LastUpdated="9/2/2020 1:30:08 AM", Lifecycle Status=Active, Minimum Order=1, Mounting Type="Surface Mount", Packaging=TapeAndReel, Part Number=MMBT3904LT1G, Part Status=Active, PartId=168, Price=0.02, Series=-, Supplier 1=DigiKey, Transistor Type=NPN, Vce Saturation (Max) @ Ib, Ic="300mV @ 5mA, 50mA"
Q2: "RoHS Compliant", Package="TO-252-3 International Rectifier", Availability="In Stock", Check_prices=https://www.snapeda.com/parts/IRFR9120NTRPBF/Infineon+Technologies/view-part/?ref=eda, MF="Infineon Technologies", MP=IRFR9120NTRPBF, Price=None, Purchase-URL=https://pricing.snapeda.com/search/part/IRFR9120NTRPBF/?ref=eda, SnapEDA_Link=https://www.snapeda.com/parts/IRFR9120NTRPBF/Infineon+Technologies/view-part/?ref=snap
Q3 Q5 Q6 Q7: "MMBT3906 Series 40 V 0.2 A 350 mW PNP General Purpose Amplifier - SOT-23", ComponentLink1Description="Manufacturer Link", ComponentLink1URL=http://www.st.com/, ComponentLink2Description=Datasheet, ComponentLink2URL=http://www.st.com/stonline/products/literature/ds/9037/2n2905a.pdf, DatasheetVersion=Nov-1997, LatestRevisionDate=11-Dec-2002, LatestRevisionNote="Sim Port Map correction", PackageDescription="Can; 3 Leads; Pin Circle Dia. 2.54 mm; Lead Dia. 0.49 mm (max)", PackageReference=TO-18, Published=8-Jun-2000, Publisher="Altium Limited"
R1 R2 R7 R9 R11 R14 R15 R18 R19 R22 R23 R24 R25 R26: library part CRG1206F10K, "RES SMD 10K OHM 1% 1/4W 1206", Device Package="1206 (3216 Metric)", Manufacturer="TE Connectivity Passive Product", Operating Temperature="-55°C ~ 155°C", Power (Watts)="0.25W, 1/4W", Supplier Device Package=1206, Supplier Part Number 1=A106069CT-ND, Temperature Coefficient=±100ppm/°C, Tolerance=±1%, ComponentLink1Description=Datasheet, ComponentLink1URL=https://www.te.com/commerce/DocumentDelivery/DDEController?Action=srchrtrv&DocNm=1773204&DocType=DS&DocLang=English, ComponentLink2Description="DigiKey Link", ComponentLink2URL=http://digikey.com/product-detail/en/te-connectivity-passive-product/CRG1206F10K/A106069CT-ND/3477720, Composition="Thick Film", Height - Seated (Max)="0.026\" (0.65mm)", LastUpdated="9/2/2020 1:13:10 AM", Lifecycle Status=Active, Minimum Order=1, Number of Terminations=2, Package / Case="1206 (3216 Metric)", Packaging=TapeAndReel, Part Number=CRG1206F10K, Part Status=Active, PartId=26989, Price=0.01, Resistance="10 kOhms", Series="CRG, Neohm", Size / Dimension="0.122\" L x 0.061\" W (3.10mm x 1.55mm)", Supplier 1=DigiKey
R6: library part 3386P-1-101T, "10k Ohms 0.5W, 1/2W PC Pins Through Hole Trimmer Potentiometer Cermet 1 Turn Top Finger Adjustment", Package="NON-STANDARD-3 Bourns", Availability="In Stock", Check_prices=https://www.snapeda.com/parts/3386P-1-101T/Bourns/view-part/?ref=eda, MF=Bourns, MP=3386P-1-101T, Price=None, Purchase-URL=https://pricing.snapeda.com/search/part/3386P-1-101T/?ref=eda, SnapEDA_Link=https://www.snapeda.com/parts/3386P-1-101T/Bourns/view-part/?ref=snap
R8 R10 R16 R17 R20 R21: library part CRG1206F1K0, "RES SMD 1K OHM 1% 1/4W 1206", Device Package="1206 (3216 Metric)", Manufacturer="TE Connectivity Passive Product", Operating Temperature="-55°C ~ 155°C", Power (Watts)="0.25W, 1/4W", Supplier Device Package=1206, Supplier Part Number 1=A106070CT-ND, Temperature Coefficient=±100ppm/°C, Tolerance=±1%, ComponentLink1Description=Datasheet, ComponentLink1URL=https://www.te.com/commerce/DocumentDelivery/DDEController?Action=srchrtrv&DocNm=1773204&DocType=DS&DocLang=English, ComponentLink2Description="DigiKey Link", ComponentLink2URL=http://digikey.com/product-detail/en/te-connectivity-passive-product/CRG1206F1K0/A106070CT-ND/3477722, Composition="Thick Film", Height - Seated (Max)="0.026\" (0.65mm)", LastUpdated="9/2/2020 1:13:10 AM", Lifecycle Status=Active, Minimum Order=1, Number of Terminations=2, Package / Case="1206 (3216 Metric)", Packaging=TapeAndReel, Part Number=CRG1206F1K0, Part Status=Active, PartId=26986, Price=0.01, Resistance="1 kOhms", Series="CRG, Neohm", Size / Dimension="0.122\" L x 0.061\" W (3.10mm x 1.55mm)", Supplier 1=DigiKey
R12 R13: library part RLP73K3AR30FTDF, "RES 0.3 OHM 1% 2W 2512", Device Package="2512 (6432 Metric)", Manufacturer="TE Connectivity Passive Product", Operating Temperature="-55°C ~ 155°C", Power (Watts)=2W, Supplier Device Package=2512, Supplier Part Number 1=A109705CT-ND, Temperature Coefficient=±200ppm/°C, Tolerance=±1%, ComponentLink1Description=Datasheet, ComponentLink1URL=https://www.te.com/commerce/DocumentDelivery/DDEController?Action=srchrtrv&DocNm=1773269&DocType=DS&DocLang=English, ComponentLink2Description="DigiKey Link", ComponentLink2URL=http://digikey.com/product-detail/en/te-connectivity-passive-product/RLP73K3AR30FTDF/A109705CT-ND/4032471, Composition="Thick Film", Features="Current Sense", Height - Seated (Max)="0.033\" (0.84mm)", LastUpdated="2.09.2020 01:26:56", Lifecycle Status=Active, Minimum Order=1, Number of Terminations=2, Package / Case="2512 (6432 Metric)", Packaging=TapeAndReel, Part Number=RLP73K3AR30FTDF, Part Status=Active, Price=0.22, Resistance="300 mOhms", Series="RL73, CGS", Size / Dimension="0.250\" L x 0.124\" W (6.35mm x 3.15mm)", Supplier 1=DigiKey
R27: library part CRGCQ1206F10R, "RES 10 OHM 1% 1/4W 1206", Device Package="1206 (3216 Metric)", Manufacturer="TE Connectivity Passive Product", Operating Temperature="-55°C ~ 155°C", Power (Watts)="0.25W, 1/4W", Ratings=AEC-Q200, Supplier Device Package=1206, Supplier Part Number 1=A129786CT-ND, Temperature Coefficient=±400ppm/°C, Tolerance=±1%, ComponentLink1Description=Datasheet, ComponentLink1URL=https://www.te.com/commerce/DocumentDelivery/DDEController?Action=srchrtrv&DocNm=1773204-3&DocType=DS&DocLang=English, ComponentLink2Description="DigiKey Link", ComponentLink2URL=https://www.digikey.com/en/products/detail/te-connectivity-passive-product/CRGCQ1206F10R/8576388, Composition="Thick Film", Features="Automotive AEC-Q200, Moisture Resistant", Height - Seated (Max)="0.026\" (0.65mm)", LastUpdated="19.09.2022 13:29:56", Lifecycle Status=Active, Minimum Order=1, Number of Terminations=2, Package / Case="1206 (3216 Metric)", Packaging=TapeAndReel, Part Number=CRGCQ1206F10R, Part Status=Active, PartId=27003, Price=0.01, Resistance=10R, Series=CRGCQ, Size / Dimension="0.122\" L x 0.061\" W (3.10mm x 1.55mm)", Supplier 1=DigiKey
S1 S2 S3 S4: "3mm Screw", ASiD Part Number=Screw-AS
TP1 TP2 TP3 TP4 TP6: library part "Test Point", "Test point", ASiD Part Number="Test Point-AS"
U1: "Buck, Boost Regulator Positive or Negative Output Step-Up, Step-Down DC-DC Controller IC 16-SOIC", Package="SOIC-16 National Semiconductor", Availability=Unavailable, MF="Texas Instruments", MP=LM3524, Price=None, SnapEDA_Link=https://www.snapeda.com/parts/LM3524/Texas%20Instruments/view-part/559291/?ref=snap
U2: "Space Saving 800mA Low-Dropout Linear Regulator with Internal Current Limit", Package="SOT-223-4 Texas Instruments", Availability=Unavailable, DigiKey-Purchase-URL=https://snapeda.com/shop?store=DigiKey&id=22380, MF="Texas Instruments", Mouser-Purchase-URL=https://snapeda.com/shop?store=Mouser&id=22380, MP=LM1117MP-5.0/NOPB, Price=None, SnapEDA_Link=https://www.snapeda.com/parts/LM1117MP-5.0/NOPB/Texas%20Instruments/view-part/22380/?ref=snap, Texas_Instruments-Purchase-URL=https://snapeda.com/shop?store=Texas+Instruments&id=22380

## Via types
v1: diameter 0.6, hole 0.3, Top Layer to Bottom Layer, tented both sides, 179 vias

## Nets (pads, with @x,y where several pads share a name; then routed paths per layer and width w, separated by ;. In a path a pad name is that pad's centre, name@x,y a point inside that pad or via, vN(x,y) a via of type N, cw(c..) or ccw(c..) an arc to the next point about the centre after c; other vN are vias at no path point)
+5V_AUX: D4.2 FB2.2 Q7.2 R14.2 R16.2 R21.2 | length 6.8
  Top Layer w0.5: R21.2 v1(21.8,9.8) ; v1(27.1,1.6) 27.8,1.6 Q7.2 ; D4.2 v1(36.3,5.425) ; R14.2 v1(36.3,10.78) ; v1(43.7,12.4) R16.2
  other v1: 36.4,34.3 36.4,35.2
+VIN: C1.1 C2.2 D1.2 FB1.1 J1.1 Q1.3 Q2.3 Q6.2 Q8.3 R1.2 R18.2 R19.2 U1.15 | length 13.6
  Top Layer w0.3: Q8.3 v1(19.1,3.5) ; v1(23.625,1.1) 23.75,1.1 Q6.2
  Top Layer w0.5: v1(19.2,4.5) R19.2 ; R18.2 v1(24.4,9.8) ; v1(47,29.7) FB1.1
  Bottom Layer w0.3: Q1.3 v1(35,34.2)
  Bottom Layer w0.5: D1.2 v1(12.5,31) ; U1.15 28.835,31.375 32.075,31.375 R1.2 C2.2
  other v1: 40.1,26.5 40.1,28.2 35.5,37.4 36.5,37.4 37.5,37.4
+VOUT: C3.1 C4.1 J3.1 L1.2 R7.2 R17.2 | length 6.8
  Top Layer w0.5: R17.2 v1(6.6,40.3)
  Top Layer w1: C3.1 C4.1
  Bottom Layer w0.5: R7.2 v1(15.1,37.3)
  other v1: 11.3,38.7 14.6,38.7 21,41.2 11.3,42.5 14.6,42.5 16.1,42.8 21,42.8 21,44.4
DRV: Q1.1 Q3.1 R1.1 TP2.1 U1.12 U1.13 | length 36.1
  Top Layer w0.3: v1(35.95,32) Q3.1
  Bottom Layer w0.3: R1.1 34.474,28.6 35.95,30.076 Q1.1 v1(35.95,32)
  Bottom Layer w0.5: R1.1 32.1,27 31.37,26.27 U1.13 U1.12 42.67,23.73 TP2.1
GND: C1.2 C2.1 C3.2 C4.2 C5.1 C7.1 C8.1 C9.1 C10.1 D2.A D5.2 D6.2 J2.1 Q3.3 Q5.3 R6.1 R6.2 R8.1 R9.1 R10.2 R11.1 R12.1 R13.1 R15.2 R22.1 R23.1 R24.1 R25.1 R26.1 U1.5 U1.8 U1.11 U1.14 U2.1 | length 35.3
  Top Layer w0.3: R15.2 v1(36.3,18.52) ; R25.1 v1(36.3,21.1) ; Q3.3 v1(35,31.95) ; v1(38.5,21.9) C1.2
  Top Layer w0.5: D6.2 v1(7.6,37.6) ; v1(12.3,5.8) R26.1 ; v1(12.3,8.4) R22.1 ; v1(12.3,11) R23.1 ; v1(13.1,19.3) 13.8,18.6 C5.1 ; v1(13.4,21.2) R10.2 ; v1(13.969,26.7) 14.025,26.7 15.1,27.775 R9.1 ; v1(26.4,12.5) Q5.3 ; R24.1 v1(27,9.8) ; v1(32.3,4.2) C8.1 ; C7.1 v1(36.3,13.36) ; C9.1 v1(40.15,39.1) ; v1(42.5,9.7) D5.2 ; v1(43.9,29.2) U2.1
  Bottom Layer w0.5: R11.1 v1(16.5,33.2) ; R8.1 17.8,27.9 18,27.7 v1(18,26.5) ; C2.1 v1(33.7,36.35) ; C10.1 44,30.6 v1(45.2,29.4)
  other v1: 15.2,1.1 8.8,2.7 12,2.7 13.6,2.7 15.2,2.7 8.8,4.3 37.9,5.425 39.5,5.425 41.1,5.425 8.8,5.9 37.9,7.025 39.5,7.025 41.1,7.025 8.8,7.5 39.5,8.625 41.1,8.625 2.315,10.96 3.915,10.96 2.315,12.56 3.915,12.56 13.4,13.9 15,13.9 16.6,13.9 18.2,13.9 19.8,13.9 21.4,13.9 2.315,14.16 3.915,14.16 2.315,15.76 3.915,15.76 12,15.9 13.4,15.9 14.8,15.9 16.2,15.9 17.6,15.9 23.6,16.1 26.3,16.1 2.315,17.36 3.915,17.36 23.6,17.7 26.3,17.7 2.315,18.96 3.915,18.96 5.515,18.96 7.115,18.96 26.3,19.1 23.6,19.3 2.315,20.46 3.915,20.46 5.515,20.46 7.115,20.46 8.715,20.46 10.315,20.46 23.6,20.9 26.3,21.1 23.6,22.5 26.3,22.5 23.6,24.1 26.3,24.1 23.6,25.7 26.3,25.7 23.6,27.3 26.3,27.3 23.6,28.9 26.3,28.9 1.5,29.6 3.1,29.6 4.7,29.6 6.3,29.6 7.9,29.6 26.3,30.5 26.3,32.1 11.1,33.2 11.1,34.5 43.9,39.7 45.5,39.7 48.7,39.7 39.7,40.2 1.1,40.4 39.2,40.8 40.2,40.8 43.9,41.3 45.5,41.3 47.1,41.3 48.7,41.3 1.1,42 8.7,45.1 8.7,46.7 11.1,47 41.9,47.5 8.7,48.3 11.1,48.3 14.3,48.3 15.9,48.3 40.3,49.1 41.9,49.1
IFB: J4.1 R12.2 R13.2 TP4.1 U1.4 | length 23.4
  Layer 4(SIG) w0.5: TP4.1 7.7,31.7 9.7,29.7 16.7,29.7 19.833,26.568 20.01,26.568 20.307,26.27 U1.4
  Bottom Layer w0.5: v1(18.5,25.5) 18.527,25.5 19.14,26.113 21.033,26.113 U1.4
  other v1: 12,25.5 13.3,25.5 14.6,25.5 15.9,25.5 17.2,25.5
NetC5_2: C5.2 U1.7 | length 3.3
  Top Layer w0.5: C5.2 18,18.65 U1.7
NetC6_1: C6.1 R15.1 | length 5
  Top Layer w0.3: R15.1 33.08,18.52 33.4,18.2 33.4,16.2 33.66,15.94 C6.1
NetC6_2: C6.2 C7.2 Q5.2 U1.9 | length 8.3
  Top Layer w0.3: U1.9 31.78,16.11 C6.2 C7.2 31.86,13.45 Q5.2
NetC8_2: C8.2 D4.1 Q5.1 R14.1 | length 7.7
  Top Layer w0.3: Q5.1 29.55,11.55 30.32,10.78 R14.1 32.05,8.65 32.175,8.525 32.225,8.575 D4.1
NetC9_2: C9.2 FB1.2 U2.3 | length 6
  Top Layer w0.5: C9.2 43.05,37.25 43.9,36.4 U2.3 43.95,34.95 46.95,34.95 FB1.2
NetC10_2: C10.2 FB2.1 U2.2 U2.4 | length 2.5
  Bottom Layer w0.5: FB2.1 41.95,34.95 C10.2
  other v1: 40.3,32 41.6,32 40.3,32.9 41.6,32.9
NetD1_1: D1.1 D3.2 R8.2 | length 4.6
  Bottom Layer w0.5: D1.1 15.05,27.95 15.013,27.987 15.013,30.513 D3.2
NetD3_1: D3.1 R2.1 R6.3 R9.2 U1.2 | length 48.8
  Top Layer w0.5: R9.2 R2.1 19.709,30.6 20.459,31.35 U1.2
  Layer 4(SIG) w0.5: R6.3 9.46,16.04 10.6,14.9 20.028,14.9 22.352,14.9 24.151,14.9 25.3,16.049 25.3,29.6 23.524,31.376 22.987,31.376 22.961,31.35 U1.2
  Bottom Layer w0.5: D3.1 18.075,30.625 18.8,31.35 U1.2
NetD5_1: D5.1 R16.1 | length 2.8
  Top Layer w0.5: D5.1 48,9.9 R16.1
NetD6_1: D6.1 R17.1 | length 2.7
  Top Layer w0.5: D6.1 2.4,37.7 R17.1
NetQ1_2: Q1.2 Q3.2 R27.1 | length 4.2
  Top Layer w0.3: R27.1 33.489,31.5 33.989,32 v1(34.05,32) Q3.2
  Bottom Layer w0.3: Q1.2 v1(34.05,32)
NetQ2_1: Q2.1 R27.2 | length 4.9
  Top Layer w0.5: Q2.1 32.1,39.112 R27.2
NetQ6_1: Q6.1 Q9.3 R18.1 | length 4.5
  Top Layer w0.3: Q9.3 22.7,3.374 22.876,3.55 Q6.1 24.4,3.65 R18.1
NetQ6_3: Q6.3 R20.2 R24.2 | length 5.9
  Top Layer w0.3: Q6.3 26.3,3.9 27,4.6 R24.2 R20.2
NetQ7_1: Q7.1 R20.1 | length 8.7
  Top Layer w0.3: Q7.1 v1(29,3.6) ; R20.1 v1(29.6,9.7)
  Bottom Layer w0.3: v1(29,3.6) 29.6,4.2 v1(29.6,9.7)
NetQ8_1: Q8.1 R19.1 R22.2 R23.2 | length 11.4
  Top Layer w0.3: R23.2@16.8,11 16.8,8.4 R19.1 19.2,7.176 19.024,7 17.976,7 17.8,6.824 17.8,4.2 17.15,3.55 Q8.1
NetQ8_2: Q8.2 Q9.2 R26.2 | length 9
  Top Layer w0.3: R26.2 16.6,5.575 16,4.975 16,1.826 16.176,1.65 Q8.2 Q9.2
NetQ9_1: Q9.1 R21.1 | length 2.5
  Top Layer w0.3: Q9.1 20.75,3.55 21.8,4.6 R21.1
NetR10_1: R10.1 U1.6 | length 3.3
  Top Layer w0.5: R10.1 17.91,21.19 U1.6
SD: Q7.3 R25.2 TP6.1 U1.10 | length 26.8
  Top Layer w0.3: U1.10 29.47,18.65 30.6,19.78 30.6,20.6 31.1,21.1 R25.2 ; Q7.3 v1(30.9,2.65)
  Bottom Layer w0.3: U1.10 28.955,18.505 30.295,18.505 30.9,17.9 v1(30.9,2.65) 30.925,2.675 34.275,2.675 TP6.1
SWN: D2.K L1.1 Q2.2
  other v1: 32.9,43.5 34,43.5 35.1,43.5 36.2,43.5 32.9,44.9 34,44.9 35.1,44.9 36.2,44.9 35.1,46.3 36.2,46.3 35.1,47.7 36.2,47.7 32.9,48.8 34,48.8 35.1,48.8 36.2,48.8
SWO: U1.3
VFB: R7.1 R11.2 TP3.1 U1.1 | length 25.6
  Layer 4(SIG) w0.5: TP3.1 3.246,34.6 4.546,35.9 16.5,35.9 18.51,33.89 U1.1
  Bottom Layer w0.5: R7.1 R11.2 19.617,33.2 20.307,33.89 U1.1
VREF: R2.2 TP1.1 U1.16 | length 68.2
  Top Layer w0.5: v1(13.7,30.6) R2.2
  Bottom Layer w0.3: v1(13.7,30.6) 13.643,30.657 13.643,30.87 13.6,30.912 13.6,39 14.4,39.8 16.6,39.8 21,35.4 26.64,35.4 U1.16@28.15,33.89 ; U1.16 U1.16@28.15,33.89 ; TP1.1 35.1,15.2 30.3,20 25.989,20 24.9,21.089 24.9,32.4 26.39,33.89 U1.16@28.15,33.89
pads on no net: D1.3 FID1.1 FID2.1 S1.0 S2.0 S3.0 S4.0

## Polygon pours and split planes (outlines as drawn)
SWN on Top Layer "SWN_L01_P004" (solid, pour order 4): 33.1,49.5 29.3,49.5 25.7,45.9 25.7,39.7 26.4,39 30.2,39 30.8,39.6 30.8,40.9 31.4,41.5 37.4,41.5 37.8,41.9 37.8,44.5 38.3,45 41.1,45 41.6,45.5 41.6,47.2 39.3,49.5
NetC10_2 on Top Layer "NETC10_2_L01_P013" (solid, remove dead copper, pour order 13): 36.8,34.6 36.8,30.6 37.3,30.1 39.9,30.1 41.3,31.5 44.9,31.5 45.5,32.1 45.5,33.7 45.1,34.1 41,34.1 40.1,35 37.2,35
+VIN on Top Layer "+VIN_L01_P008" (solid, remove dead copper, pour order 8): 37.7,26 40.4,26 40.8,26.4 40.8,28.4 40.3,28.9 37.8,28.9 37.5,28.6 37.5,26.2
+VIN on Top Layer "+VIN_L01_P007" (solid, remove dead copper, pour order 7): 35.4,40.8 34.9,40.3 34.9,37.1 35.3,36.7 37.7,36.7 38.1,37.1 38.1,40.4 37.7,40.8
GND on Top Layer "GND_L01_P006" (solid, remove dead copper, pour order 6): 38.6,42.9 38.6,40 38.8,39.8 40.5,39.8 40.8,40.1 40.8,42.8 40.7,42.9
+VOUT on Top Layer "+VOUT_L01_P003" (solid, remove dead copper, pour order 3): 10.8,37.5 11.7,36.6 14,36.6 14.3,36.9 14.3,37.7 15.9,39.3 21,39.3 21.7,40 21.7,45.8 21.2,46.3 16.5,46.3 14.9,44.7 11.5,44.7 10.8,44
GND on Top Layer "GND_L01_P002" (solid, remove dead copper, pour order 2): 10.4,45.9 11.1,45.2 13.3,45.2 13.7,45.6 13.7,49.3 13.4,49.6 10.8,49.6 10.4,49.2
GND on Top Layer "GND_L01_P001" (solid, remove dead copper, pour order 1): 10.6,31.9 10.9,31.6 13.3,31.6 13.7,32 13.7,35.5 13.2,36 11,36 10.6,35.6
+VIN on Layer 3(PWR) "+VIN_L03_P012" (solid, remove dead copper, pour order 12): 32.8,38.5 19,38.5 11.7,31.2 11.7,29.3 12,29 18.8,29 19.3,29.5 19.3,34.6 19.9,35.2 22.8,35.2 23.4,34.6 23.3,34.5 23.3,30.6 24.1,29.8 27.4,29.8 35.1,29.8 37.4,27.5 37.4,20.8 31,14.4 21.7,14.4 17.6,10.3 17.6,2.1 19.4,0.3 36,0.3 44.825,9.125 44.825,24.025 45.7,24.9 48,24.9 49.2,26.1 49.2,37.9 48.6,38.5
+VOUT on Layer 3(PWR) "+VOUT_L03_P009" (solid, remove dead copper, pour order 9): 19.1,39.3 20.6,39.3 21.9,40.6 21.9,45.8 20.5,47.2 12.1,47.2 6,41.1 2.7,41.1 0.9,39.3 0.9,25.8 1.6,25.1 4.9,25.1
IFB on Layer 3(PWR) "IFB_L03_P011" (solid, pour order 11): 1,21.7 1.6,21.1 9.7,21.1 10.9,22.3 18.5,22.3 19.2,23 19.2,28.2 18.7,28.7 10.2,28.7 6.3,24.8 1.8,24.8 1,24
NetC10_2 on Bottom Layer "NETC10_2_L06_P021" (solid, remove dead copper, pour order 21): 39.5,36 39.9,36.4 45.1,36.4 45.4,36.1 45.4,34 44.9,33.5 43.1,33.5 42.6,33 42.6,31.7 41.6,30.7 40,30.7 39.5,31.2
GND on Bottom Layer "GND_L06_P020" (solid, remove dead copper, pour order 20): 10.4,15.9 11.2,15.1 18.5,15.1 19.2,15.8 19.2,18.9 18.3,19.8 11,19.8 10.4,19.2
+5V_AUX on Bottom Layer "+5V_AUX_L06_P014" (solid, remove dead copper, pour order 14): 36.2,33.2 38.6,33.2 39,33.6 39,35.8 38.7,36.1 36.3,36.1 35.9,35.7 35.9,33.5
IFB on Bottom Layer "IFB_L06_P010" (solid, remove dead copper, pour order 10): 10.3,22.9 10.3,25.1 11.3,26.1 18.7,26.1 19.5,25.3 19.4,25.2 19.4,22.8 18.9,22.3 10.9,22.3
+5V_AUX on Layer 4(SIG) "+5V_AUX_L04_P015" (solid, remove dead copper, pour order 15): 19.9,10 19.9,1.1 20.5,0.5 35.5,0.5 45.795,10.795 45.795,14.905 41.1,19.6 36.6,19.6 35.4,20.8 35.4,28.4 39.5,32.5 39.5,35.6 38.5,36.6 33.4,36.6 31,34.2 31,15.7 27.1,11.8 21.7,11.8
GND on Layer 2(GND) "GND_L02_P018" (solid, pour order 18): 4.097,0 cw(c4.097,4.097) 0,4.097 0,45.903 cw(c4.097,45.903) 4.097,50 45.795,50 cw(c45.795,45.795) 50,45.795 50,4.097 cw(c45.903,4.097) 45.903,0
GND on Layer 5(GND) "GND_L05_P019" (solid, pour order 19): 4.097,0 cw(c4.097,4.097) 0,4.097 0,45.903 cw(c4.097,45.903) 4.097,50 45.795,50 cw(c45.795,45.795) 50,45.795 50,4.097 cw(c45.903,4.097) 45.903,0

## Keep-outs
Keep-Out Layer:
  the board outline again, w0.3

## Other copper
Top Layer:
  text "BY / OKAN" at 36.6,1.4 h1.52
Bottom Layer:
  drawing of 19 lines, arcs and shapes, not listed

## Silkscreen, mask and mechanical layers (free items; w line width, h text height)
Top Overlay:
  lines w0.254: 5,21.1 5,24.8 ; 5,25.1 5,28.8 ; 45,21.2 45,24.9 ; 45,25.2 45,28.9 ; 1,21.1 1,24.9 10.9,24.9 10.9,21.1 1,21.1 ; 1,25.1 10.9,25.1 10.9,28.9 1,28.9 1,25.1 ; 41.3,21.1 41.3,24.9 49,24.9 49,21.1 41.3,21.1 ; 41.3,25.1 49,25.1 49,28.9 41.3,28.9 41.3,25.1
  text "VFB" at 4.854,34.054 h2.03
  text "IFB" at 4.854,31.154 h2.03
  text "OUT+" at 5.554,26.378 h2.03
  text "IN+" at 41.854,26.354 h2.03
  text "_" at 9.354,23.213 h2.03
  text "_" at 43.654,23.213 h2.03
  text "OUT" at 5.554,22.378 h2.03
  text "IN" at 41.854,22.354 h2.03
  text "DRV" at 42.154,18.054 h2.03
  text "VSET" at 10.378,15.146 h2.03 r270
  text "VREF" at 41.054,14.554 h2.03
Top Solder:
  text "BY / OKAN" at 36.6,1.4 h1.52

## Text inside footprints (layer, text, board x,y; h text height)
Q2: Mechanical 13 "1" at 31.885,41.571 h0.61; Mechanical 13 "2" at 34.097,41.57 h0.61; Mechanical 13 "3" at 36.283,41.571 h0.61; Mechanical 13 "4" at 33.969,45.943 h0.61